# EAGLE board Qwiic-Cellular-Notepad-Panel (EAGLE 9.6.2), part 1 of 2
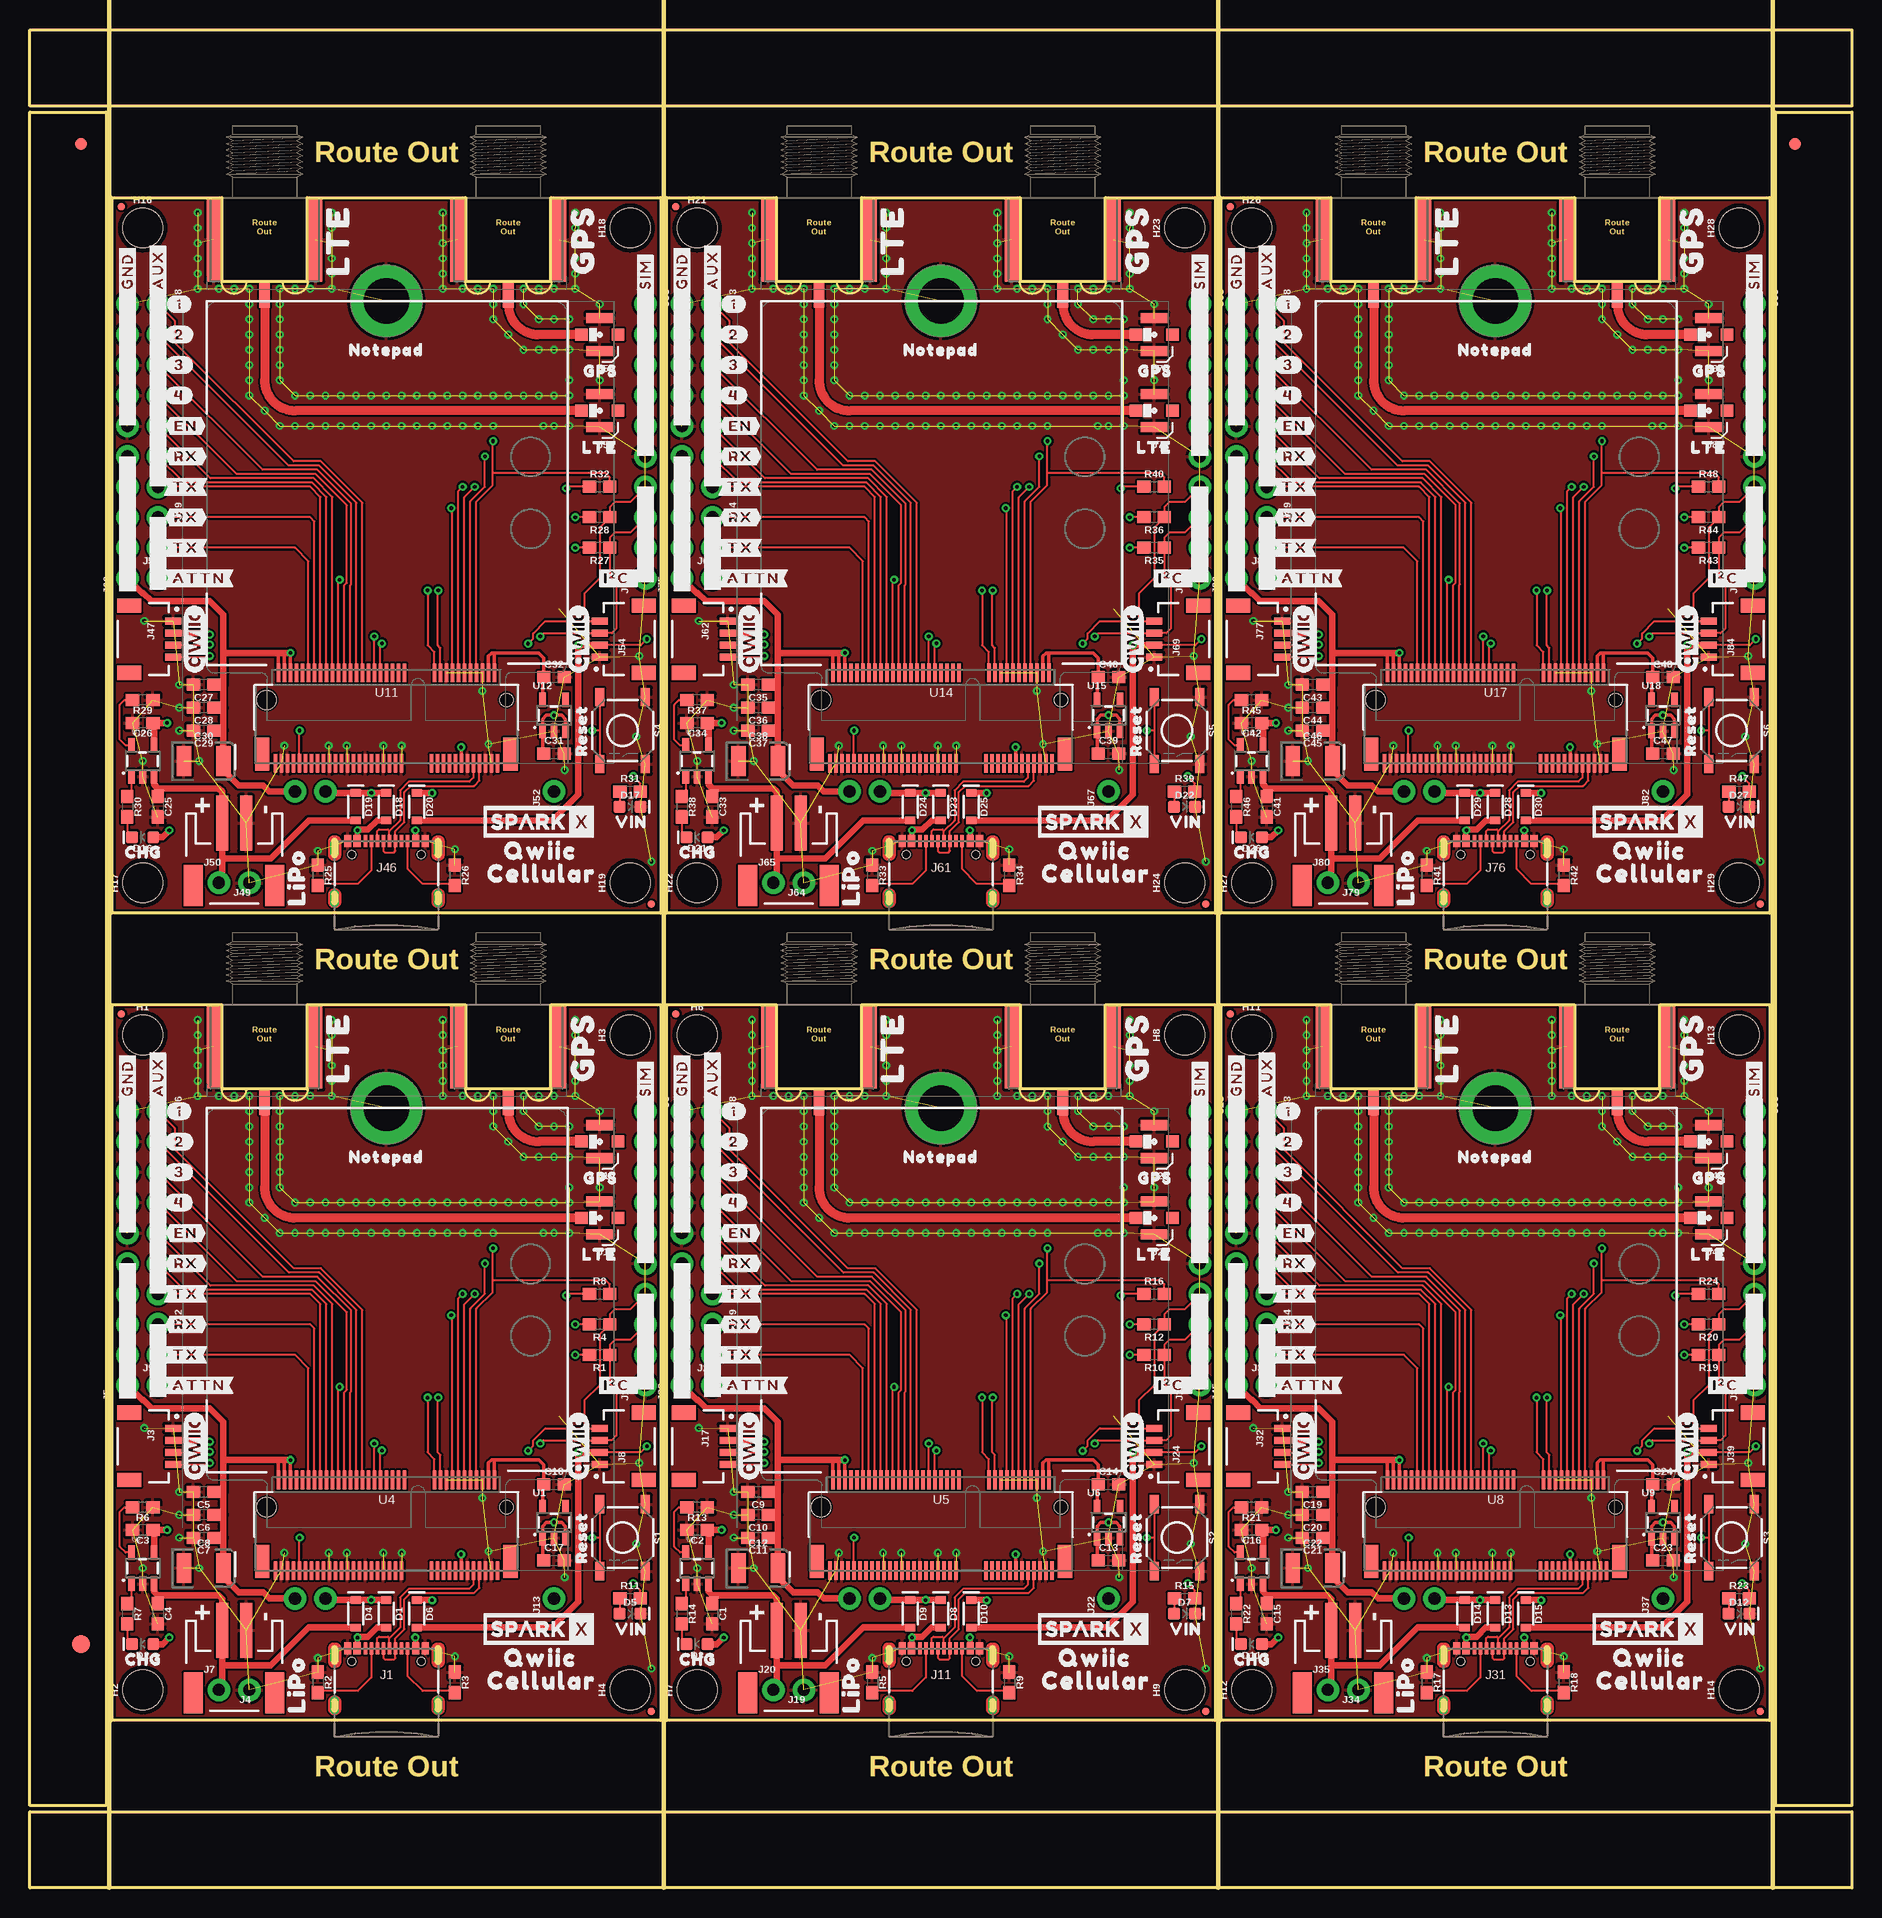
[diagram p0: board, top side]
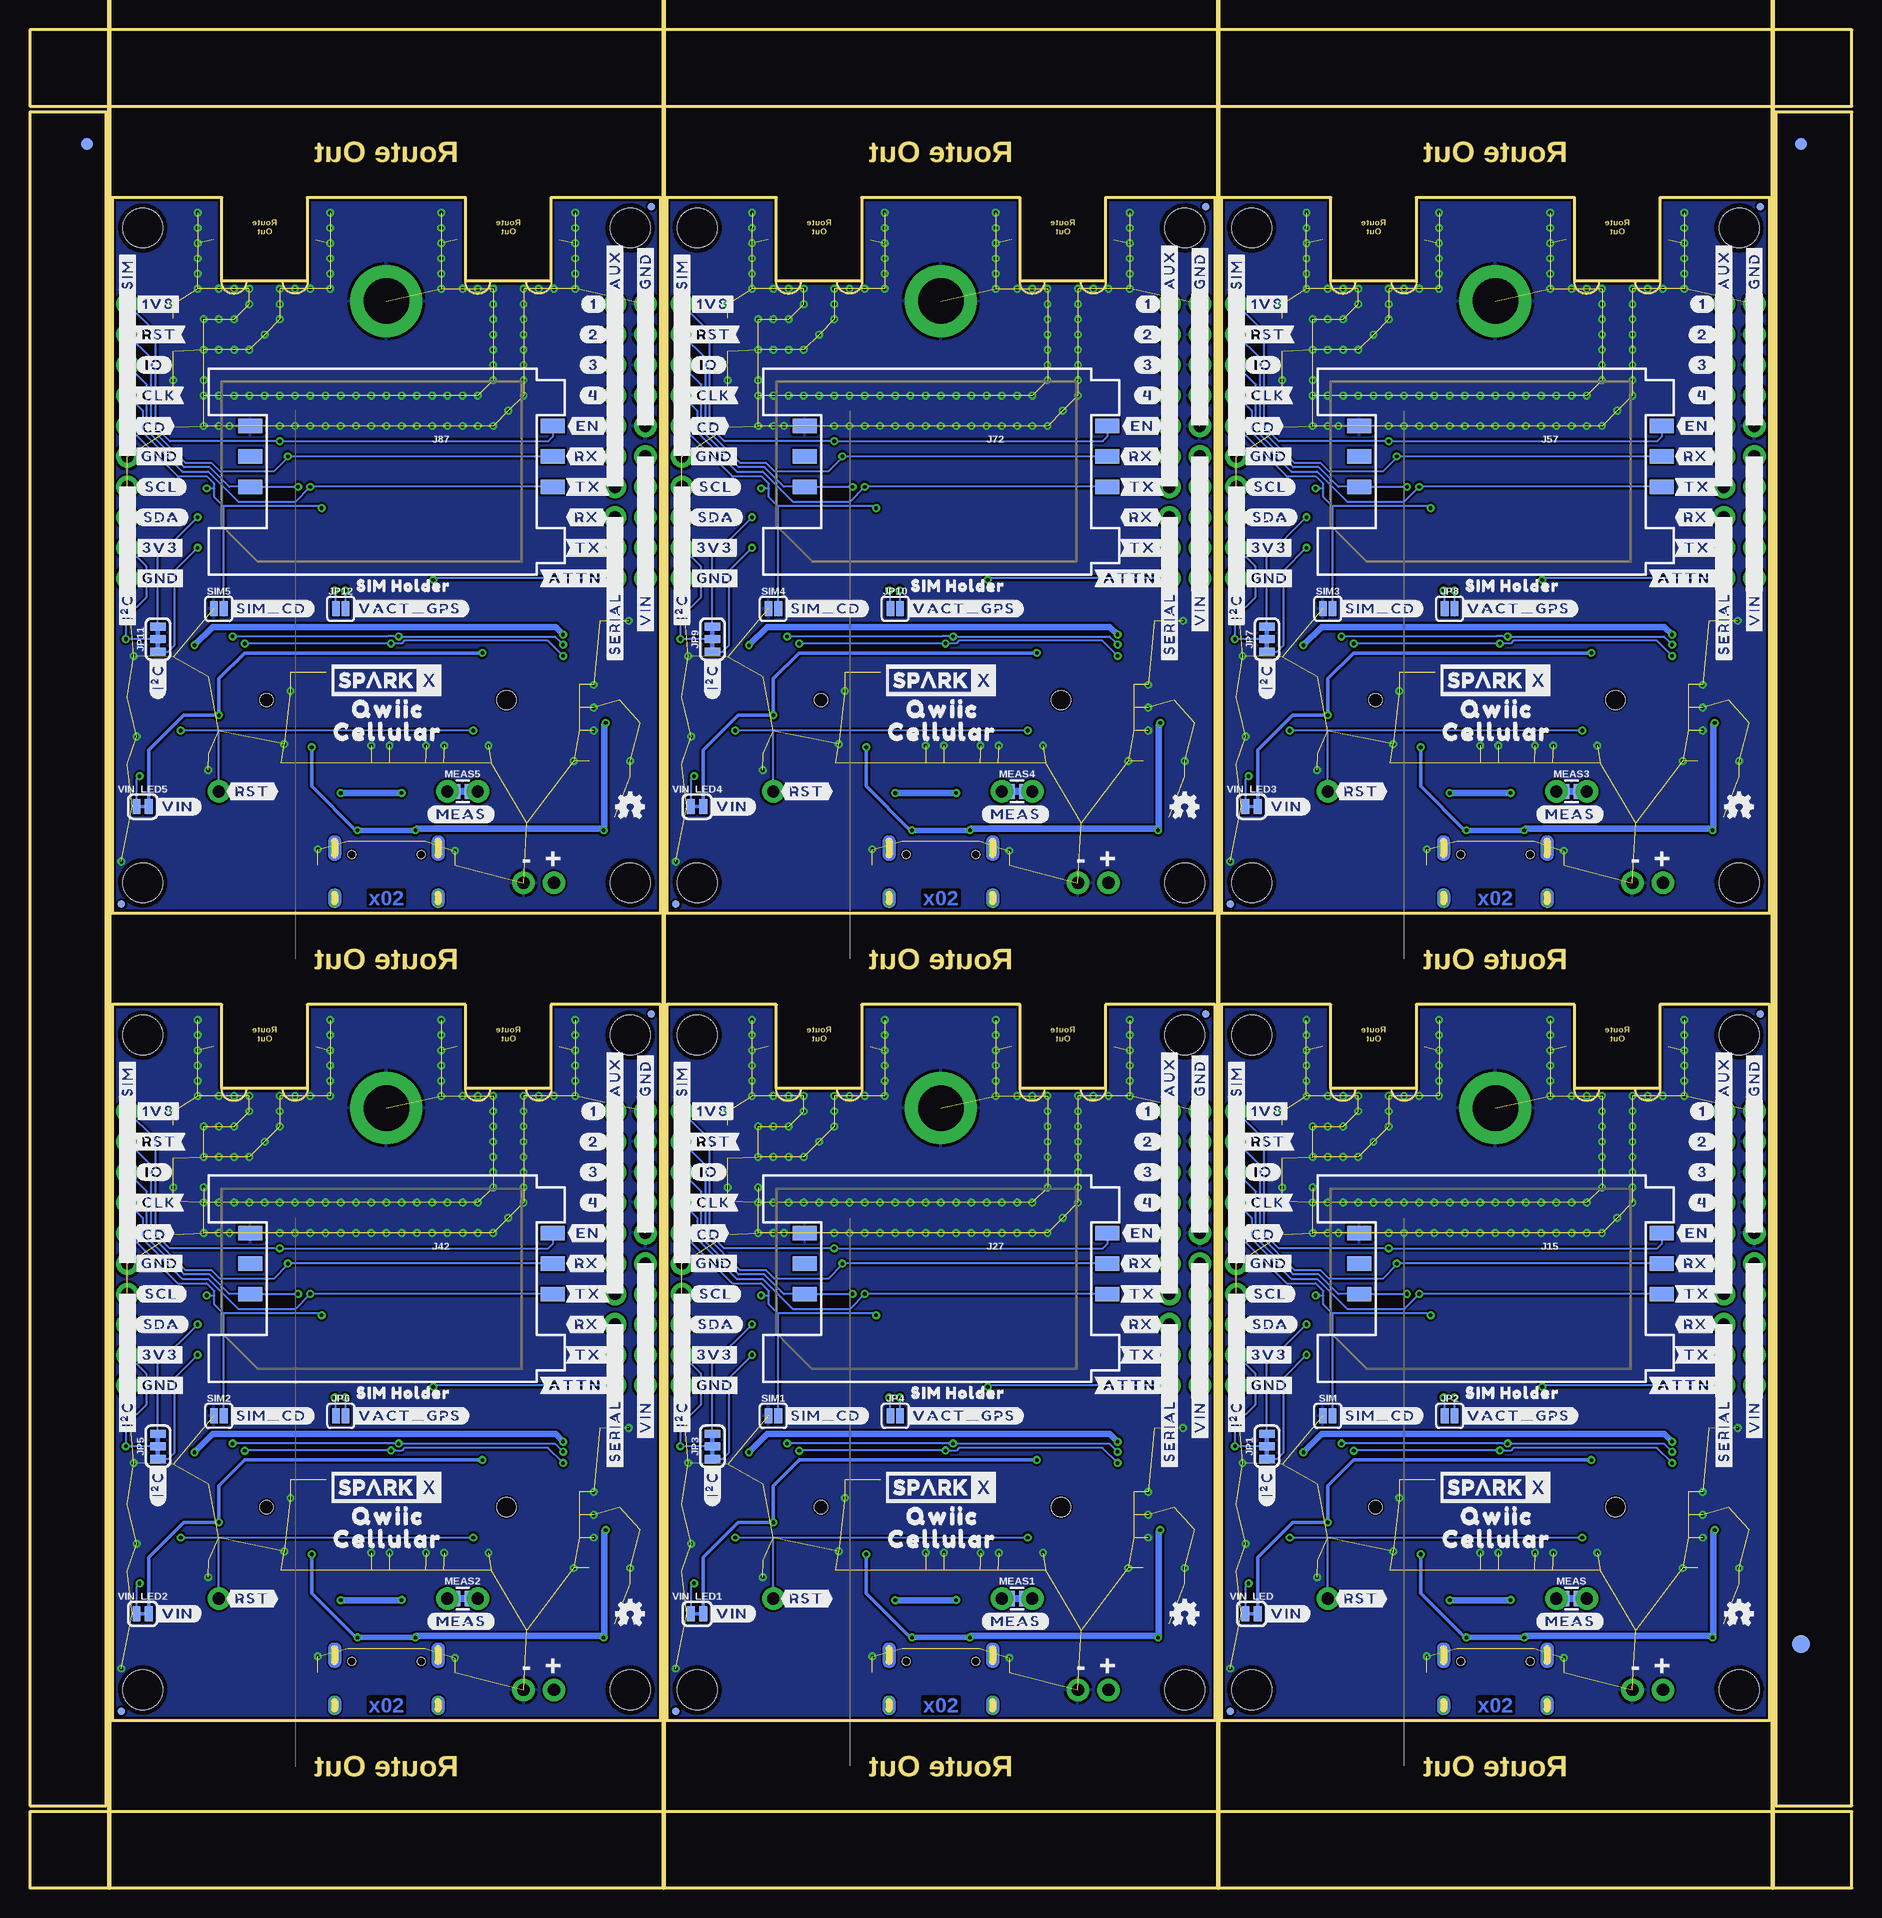
[diagram p1: board, bottom side, seen from below]

Size 151.89 x 154.94 mm. Coordinates in mm from the lower left corner, seen from the top.
Outline: 52.58,13.97 6.86,13.97 6.86,73.66 16,73.66 16,66.67 23.11,66.67 23.11,73.66 36.32,73.66 36.32,66.67 43.43,66.67 43.43,73.66 52.58,73.66 52.58,13.97
Outline: 98.81,13.97 53.09,13.97 53.09,73.66 62.23,73.66 62.23,66.67 69.34,66.67 69.34,73.66 82.55,73.66 82.55,66.67 89.66,66.67 89.66,73.66 98.81,73.66 98.81,13.97
Outline: 145.03,13.97 99.31,13.97 99.31,73.66 108.46,73.66 108.46,66.67 115.57,66.67 115.57,73.66 128.78,73.66 128.78,66.67 135.89,66.67 135.89,73.66 145.03,73.66 145.03,13.97
Outline: 52.58,81.28 6.86,81.28 6.86,140.97 16,140.97 16,133.99 23.11,133.99 23.11,140.97 36.32,140.97 36.32,133.99 43.43,133.99 43.43,140.97 52.58,140.97 52.58,81.28
Outline: 98.81,81.28 53.09,81.28 53.09,140.97 62.23,140.97 62.23,133.99 69.34,133.99 69.34,140.97 82.55,140.97 82.55,133.99 89.66,133.99 89.66,140.97 98.81,140.97 98.81,81.28
Outline: 145.03,81.28 99.31,81.28 99.31,140.97 108.46,140.97 108.46,133.99 115.57,133.99 115.57,140.97 128.78,140.97 128.78,133.99 135.89,133.99 135.89,140.97 145.03,140.97 145.03,81.28
Outline: 0,6.35 151.89,6.35 151.89,0 0,0 0,6.35
Outline: 145.54,148.08 151.89,148.08 151.89,6.86 145.54,6.86 145.54,148.08
Outline: 0,154.94 151.89,154.94 151.89,148.59 0,148.59 0,154.94
Outline: 0,148.08 6.35,148.08 6.35,6.86 0,6.86 0,148.08
Copper layers (1*16): Top 0.035mm / dielectric 1.5mm / Bottom 0.035mm
Design rules "Qwiic-Cellular-Notepad": minimum track width 7mil, minimum drill 12mil, track to track 7mil, track to pad 7mil, pad to pad 7mil, via to via 7mil, smd to smd 7mil, copper to edge 7mil, drill to drill 7mil, minimum pad ring 7mil, minimum via ring 7mil, stop-mask expansion 4mil, vias tented up to drill 25mil, thermal gap 10mil
Net classes: 1 power: width 0.305 mm
Milling: 5 lines

## Footprints (pad centres in the part's own frame; a part is rotated, then mirrored left to right if it is on the bottom)
0603 = smd 1.1 x 1: 1 -0.85,0; 2 0.85,0
EIA3528 = smd 1.2 x 2.5: A 1.65,0; C -1.65,0
SOD-323 = smd 0.63 x 0.83: A 1.15,0; C -1.15,0
LED-0603 = smd 1 x 1: A -0.877,0; C 0.877,0
SMA-EDGE-SMD = smd 1.15 x 7: GND@0 -4.25,-3.5; GND@1 4.25,-3.5 | smd 0.9 x 2.2: SIG 0,-8.1
FIDUCIAL-1X2 = smd 1 x 1: 1 0,0
FIDUCIAL-1.5X3 = smd 1.5 x 1.5: 1 0,0
FIDUCIAL-MICRO = smd 0.635 x 0.635: 1 0,0
STAND-OFF = hole 3.302: 0,0
STAND-OFF-REFLOW-M2.5 = drill 3.8 pad 6: 1 0,0
USB-C-16P-2LAYER-PADS = smd 0.3 x 1: A5 -1.25,-0.34; A6 -0.25,-0.34; A7 0.25,-0.34; A8 1.25,-0.34; B5 1.75,-0.34; B6 0.75,-0.34; B7 -0.75,-0.34; B8 -1.75,-0.34 | smd 0.6 x 1: GND -3.225,-0.34; GND2 3.225,-0.34; VBUS1 -2.45,-0.34; VBUS2 2.45,-0.34 | drill 0.4 pad 0.6 long: SHLD1 -4.318,-0.915; SHLD2 4.318,-0.915; SHLD3 -4.318,-5.095; SHLD4 4.318,-5.095 | hole 0.65: -2.89,-1.445; 2.89,-1.445
1X02_NO_SILK = drill 1.016 pad 1.88: 1 0,0; 2 2.54,0
JST04_1MM_RA = smd 0.6 x 1.35: 1 -1.5,0; 2 -0.5,0; 3 0.5,0; 4 1.5,0 | smd 1.2 x 2: NC1 2.8,-3.675; NC2 -2.8,-3.675
JST-2-SMD = smd 1 x 4.6: 1 -1,-3.7; 2 1,-3.7 | smd 1.6 x 3.4: NC1 -3.4,1.5; NC2 3.4,1.5
1X10_NO_SILK = drill 1.016 pad 1.88: 1 0,0; 2 2.54,0; 3 5.08,0; 4 7.62,0; 5 10.16,0; 6 12.7,0; 7 15.24,0; 8 17.78,0; 9 20.32,0; 10 22.86,0
1X06_NO_SILK = drill 1.016 pad 1.88: 1 0,0; 2 2.54,0; 3 5.08,0; 4 7.62,0; 5 10.16,0; 6 12.7,0
1X01_NO_SILK = drill 1.016 pad 1.88: 1 0,0
U.FL = smd 2.2 x 0.85: 1 0,1.375; 2 0,-1.375 | smd 1.05 x 1: FEED 1.525,0; NC -1.525,0
1X04_NO_SILK = drill 1.016 pad 1.88: 1 0,0; 2 2.54,0; 3 5.08,0; 4 7.62,0
SIMHOLDER = smd 2 x 1.2: C1 -12.61,-3.81; C2 -12.61,-1.27; C3 -12.61,1.27; C5 12.61,-3.81; C6 12.61,-1.27; C7 12.61,1.27
1X07_NO_SILK = drill 1.016 pad 1.88: 1 0,0; 2 2.54,0; 3 5.08,0; 4 7.62,0; 5 10.16,0; 6 12.7,0; 7 15.24,0
SMT-JUMPER_3_2-NC_TRACE_SILK = smd 0.66 x 1.27: 1 -1.041,0; 2 0,0; 3 1.041,0
SMT-JUMPER_2_NO_SILK = smd 0.635 x 1.27: 1 -0.406,0; 2 0.406,0
COMBO-JUMPER_2_NC_TRACE = smd 0.635 x 1.27: 1 -0.508,0; 2 0.508,0 | drill 1.016 pad 1.88: 3 -1.27,0; 4 1.27,0
TACTILE_SWITCH_SMD_5.2MM = smd 1.524 x 0.762: 1 -2.794,1.905; 2 2.794,1.905; 3 -2.794,-1.905; 4 2.794,-1.905
SOT23-5 = smd 0.55 x 1.2: 1 -0.95,-1.3; 2 0,-1.3; 3 0.95,-1.3; 4 0.95,1.3; 5 -0.95,1.3
M.2-CONNECTOR-E = smd 0.3 x 1.55: 1 9.25,-5.275; 2 9,2.275; 3 8.75,-5.275; 4 8.5,2.275; 5 8.25,-5.275; 6 8,2.275; 7 7.75,-5.275; 8 7.5,2.275; 9 7.25,-5.275; 10 7,2.275; 11 6.75,-5.275; 12 6.5,2.275; 13 6.25,-5.275; 14 6,2.275; 15 5.75,-5.275; 16 5.5,2.275; 17 5.25,-5.275; 18 5,2.275; 19 4.75,-5.275; 20 4.5,2.275; 21 4.25,-5.275; 22 4,2.275; 23 3.75,-5.275; 32 1.5,2.275; 33 1.25,-5.275; 34 1,2.275; 35 0.75,-5.275; 36 0.5,2.275; 37 0.25,-5.275; 38 0,2.275; 39 -0.25,-5.275; 40 -0.5,2.275; 41 -0.75,-5.275; 42 -1,2.275; 43 -1.25,-5.275; 44 -1.5,2.275; 45 -1.75,-5.275; 46 -2,2.275; 47 -2.25,-5.275; 48 -2.5,2.275; 49 -2.75,-5.275; 50 -3,2.275; 51 -3.25,-5.275; 52 -3.5,2.275; 53 -3.75,-5.275; 54 -4,2.275; 55 -4.25,-5.275; 56 -4.5,2.275; 57 -4.75,-5.275; 58 -5,2.275; 59 -5.25,-5.275; 60 -5.5,2.275; 61 -5.75,-5.275; 62 -6,2.275; 63 -6.25,-5.275; 64 -6.5,2.275; 65 -6.75,-5.275; 66 -7,2.275; 67 -7.25,-5.275; 68 -7.5,2.275; 69 -7.75,-5.275; 70 -8,2.275; 71 -8.25,-5.275; 72 -8.5,2.275; 73 -8.75,-5.275; 74 -9,2.275; 75 -9.25,-5.275 | smd 1.2 x 2.75: A1 10.35,-4.5; A2 -10.35,-4.5 | hole 1.1: 10,0 | hole 1.6: -10,0
SMT-JUMPER_2_NC_TRACE_SILK = smd 0.66 x 1.27: 1 -0.521,0; 2 0.521,0

## Placement (x,y rotation side)
C1  4.7uF  [0603]  56.9,22.86 270 top
C2  4.7uF  [0603]  55.63,29.84 180 top
C3  4.7uF  [0603]  9.4,29.84 180 top
C4  4.7uF  [0603]  10.67,22.86 270 top
C5  1.0uF  [0603]  14.48,33.02 180 top
C6  0.1uF  [0603]  14.48,31.12 180 top
C7  0.22uF  [0603]  14.48,29.21 180 top
C8  68uF  [EIA3528]  14.48,26.67 0 top
C9  1.0uF  [0603]  60.71,33.02 180 top
C10  0.1uF  [0603]  60.71,31.12 180 top
C11  0.22uF  [0603]  60.71,29.21 180 top
C12  68uF  [EIA3528]  60.71,26.67 0 top
C13  1.0uF  [0603]  89.92,27.3 0 top
C14  1.0uF  [0603]  89.92,33.66 0 top
C15  4.7uF  [0603]  103.12,22.86 270 top
C16  4.7uF  [0603]  101.85,29.84 180 top
C17  1.0uF  [0603]  43.69,27.3 0 top
C18  1.0uF  [0603]  43.69,33.66 0 top
C19  1.0uF  [0603]  106.93,33.02 180 top
C20  0.1uF  [0603]  106.93,31.12 180 top
C21  0.22uF  [0603]  106.93,29.21 180 top
C22  68uF  [EIA3528]  106.93,26.67 0 top
C23  1.0uF  [0603]  136.14,27.3 0 top
C24  1.0uF  [0603]  136.14,33.66 0 top
C25  4.7uF  [0603]  10.67,90.17 270 top
C26  4.7uF  [0603]  9.4,97.16 180 top
C27  1.0uF  [0603]  14.48,100.33 180 top
C28  0.1uF  [0603]  14.48,98.42 180 top
C29  0.22uF  [0603]  14.48,96.52 180 top
C30  68uF  [EIA3528]  14.48,93.98 0 top
C31  1.0uF  [0603]  43.69,94.61 0 top
C32  1.0uF  [0603]  43.69,100.97 0 top
C33  4.7uF  [0603]  56.9,90.17 270 top
C34  4.7uF  [0603]  55.63,97.16 180 top
C35  1.0uF  [0603]  60.71,100.33 180 top
C36  0.1uF  [0603]  60.71,98.42 180 top
C37  0.22uF  [0603]  60.71,96.52 180 top
C38  68uF  [EIA3528]  60.71,93.98 0 top
C39  1.0uF  [0603]  89.92,94.61 0 top
C40  1.0uF  [0603]  89.92,100.97 0 top
C41  4.7uF  [0603]  103.12,90.17 270 top
C42  4.7uF  [0603]  101.85,97.16 180 top
C43  1.0uF  [0603]  106.93,100.33 180 top
C44  0.1uF  [0603]  106.93,98.42 180 top
C45  0.22uF  [0603]  106.93,96.52 180 top
C46  68uF  [EIA3528]  106.93,93.98 0 top
C47  1.0uF  [0603]  136.14,94.61 0 top
C48  1.0uF  [0603]  136.14,100.97 0 top
D1  3A/10V/280mV  [SOD-323]  29.72,22.86 270 top
D2  Yellow  [LED-0603]  9.4,20.32 180 top
D3  Yellow  [LED-0603]  55.63,20.32 180 top
D4  3A/10V/280mV  [SOD-323]  27.18,22.86 270 top
D5  RED  [LED-0603]  50.04,22.86 0 top
D6  3A/10V/280mV  [SOD-323]  32.26,22.86 270 top
D7  RED  [LED-0603]  96.27,22.86 0 top
D8  3A/10V/280mV  [SOD-323]  75.95,22.86 270 top
D9  3A/10V/280mV  [SOD-323]  73.41,22.86 270 top
D10  3A/10V/280mV  [SOD-323]  78.49,22.86 270 top
D11  Yellow  [LED-0603]  101.85,20.32 180 top
D12  RED  [LED-0603]  142.49,22.86 0 top
D13  3A/10V/280mV  [SOD-323]  122.17,22.86 270 top
D14  3A/10V/280mV  [SOD-323]  119.63,22.86 270 top
D15  3A/10V/280mV  [SOD-323]  124.71,22.86 270 top
D16  Yellow  [LED-0603]  9.4,87.63 180 top
D17  RED  [LED-0603]  50.04,90.17 0 top
D18  3A/10V/280mV  [SOD-323]  29.72,90.17 270 top
D19  3A/10V/280mV  [SOD-323]  27.18,90.17 270 top
D20  3A/10V/280mV  [SOD-323]  32.26,90.17 270 top
D21  Yellow  [LED-0603]  55.63,87.63 180 top
D22  RED  [LED-0603]  96.27,90.17 0 top
D23  3A/10V/280mV  [SOD-323]  75.95,90.17 270 top
D24  3A/10V/280mV  [SOD-323]  73.41,90.17 270 top
D25  3A/10V/280mV  [SOD-323]  78.49,90.17 270 top
D26  Yellow  [LED-0603]  101.85,87.63 180 top
D27  RED  [LED-0603]  142.49,90.17 0 top
D28  3A/10V/280mV  [SOD-323]  122.17,90.17 270 top
D29  3A/10V/280mV  [SOD-323]  119.63,90.17 270 top
D30  3A/10V/280mV  [SOD-323]  124.71,90.17 270 top
E1  SMA  [SMA-EDGE-SMD]  65.79,73.66 0 top
E2  SMA  [SMA-EDGE-SMD]  86.11,73.66 0 top
E3  SMA  [SMA-EDGE-SMD]  19.56,73.66 0 top
E4  SMA  [SMA-EDGE-SMD]  39.88,73.66 0 top
E5  SMA  [SMA-EDGE-SMD]  112.01,73.66 0 top
E6  SMA  [SMA-EDGE-SMD]  132.33,73.66 0 top
E7  SMA  [SMA-EDGE-SMD]  19.56,140.97 0 top
E8  SMA  [SMA-EDGE-SMD]  39.88,140.97 0 top
E9  SMA  [SMA-EDGE-SMD]  65.79,140.97 0 top
E10  SMA  [SMA-EDGE-SMD]  86.11,140.97 0 top
E11  SMA  [SMA-EDGE-SMD]  112.01,140.97 0 top
E12  SMA  [SMA-EDGE-SMD]  132.33,140.97 0 top
E$1  [FIDUCIAL-1X2]  4.23,145.41 0 top
E$2  [FIDUCIAL-1X2]  4.23,145.41 0 bottom
E$3  [FIDUCIAL-1X2]  147.15,145.41 0 top
E$4  [FIDUCIAL-1X2]  147.15,145.41 0 bottom
E$5  [FIDUCIAL-1.5X3]  4.23,20.32 0 top
E$6  [FIDUCIAL-1.5X3]  4.23,20.32 0 bottom
FD1  FIDUCIALUFIDUCIAL  [FIDUCIAL-MICRO]  51.82,14.73 90 top
FD2  FIDUCIALUFIDUCIAL  [FIDUCIAL-MICRO]  7.62,72.9 90 top
FD3  FIDUCIALUFIDUCIAL  [FIDUCIAL-MICRO]  51.82,14.73 270 bottom
FD4  FIDUCIALUFIDUCIAL  [FIDUCIAL-MICRO]  7.62,72.9 270 bottom
FD5  FIDUCIALUFIDUCIAL  [FIDUCIAL-MICRO]  98.04,14.73 90 top
FD6  FIDUCIALUFIDUCIAL  [FIDUCIAL-MICRO]  53.85,72.9 90 top
FD7  FIDUCIALUFIDUCIAL  [FIDUCIAL-MICRO]  98.04,14.73 270 bottom
FD8  FIDUCIALUFIDUCIAL  [FIDUCIAL-MICRO]  53.85,72.9 270 bottom
FD9  FIDUCIALUFIDUCIAL  [FIDUCIAL-MICRO]  144.27,14.73 90 top
FD10  FIDUCIALUFIDUCIAL  [FIDUCIAL-MICRO]  100.08,72.9 90 top
FD11  FIDUCIALUFIDUCIAL  [FIDUCIAL-MICRO]  144.27,14.73 270 bottom
FD12  FIDUCIALUFIDUCIAL  [FIDUCIAL-MICRO]  100.08,72.9 270 bottom
FD13  FIDUCIALUFIDUCIAL  [FIDUCIAL-MICRO]  51.82,82.04 90 top
FD14  FIDUCIALUFIDUCIAL  [FIDUCIAL-MICRO]  7.62,140.21 90 top
FD15  FIDUCIALUFIDUCIAL  [FIDUCIAL-MICRO]  51.82,82.04 270 bottom
FD16  FIDUCIALUFIDUCIAL  [FIDUCIAL-MICRO]  7.62,140.21 270 bottom
FD17  FIDUCIALUFIDUCIAL  [FIDUCIAL-MICRO]  98.04,82.04 90 top
FD18  FIDUCIALUFIDUCIAL  [FIDUCIAL-MICRO]  53.85,140.21 90 top
FD19  FIDUCIALUFIDUCIAL  [FIDUCIAL-MICRO]  98.04,82.04 270 bottom
FD20  FIDUCIALUFIDUCIAL  [FIDUCIAL-MICRO]  53.85,140.21 270 bottom
FD21  FIDUCIALUFIDUCIAL  [FIDUCIAL-MICRO]  144.27,82.04 90 top
FD22  FIDUCIALUFIDUCIAL  [FIDUCIAL-MICRO]  100.08,140.21 90 top
FD23  FIDUCIALUFIDUCIAL  [FIDUCIAL-MICRO]  144.27,82.04 270 bottom
FD24  FIDUCIALUFIDUCIAL  [FIDUCIAL-MICRO]  100.08,140.21 270 bottom
H1  STAND-OFF  [STAND-OFF]  9.4,71.12 0 top
H2  STAND-OFF  [STAND-OFF]  9.4,16.51 90 top
H3  STAND-OFF  [STAND-OFF]  50.04,71.12 90 top
H4  STAND-OFF  [STAND-OFF]  50.04,16.51 90 top
H5  STAND-OFF  [STAND-OFF-REFLOW-M2.5]  29.72,65.02 0 top
H6  STAND-OFF  [STAND-OFF]  55.63,71.12 0 top
H7  STAND-OFF  [STAND-OFF]  55.63,16.51 90 top
H8  STAND-OFF  [STAND-OFF]  96.27,71.12 90 top
H9  STAND-OFF  [STAND-OFF]  96.27,16.51 90 top
H10  STAND-OFF  [STAND-OFF-REFLOW-M2.5]  75.95,65.02 0 top
H11  STAND-OFF  [STAND-OFF]  101.85,71.12 0 top
H12  STAND-OFF  [STAND-OFF]  101.85,16.51 90 top
H13  STAND-OFF  [STAND-OFF]  142.49,71.12 90 top
H14  STAND-OFF  [STAND-OFF]  142.49,16.51 90 top
H15  STAND-OFF  [STAND-OFF-REFLOW-M2.5]  122.17,65.02 0 top
H16  STAND-OFF  [STAND-OFF]  9.4,138.43 0 top
H17  STAND-OFF  [STAND-OFF]  9.4,83.82 90 top
H18  STAND-OFF  [STAND-OFF]  50.04,138.43 90 top
H19  STAND-OFF  [STAND-OFF]  50.04,83.82 90 top
H20  STAND-OFF  [STAND-OFF-REFLOW-M2.5]  29.72,132.33 0 top
H21  STAND-OFF  [STAND-OFF]  55.63,138.43 0 top
H22  STAND-OFF  [STAND-OFF]  55.63,83.82 90 top
H23  STAND-OFF  [STAND-OFF]  96.27,138.43 90 top
H24  STAND-OFF  [STAND-OFF]  96.27,83.82 90 top
H25  STAND-OFF  [STAND-OFF-REFLOW-M2.5]  75.95,132.33 0 top
H26  STAND-OFF  [STAND-OFF]  101.85,138.43 0 top
H27  STAND-OFF  [STAND-OFF]  101.85,83.82 90 top
H28  STAND-OFF  [STAND-OFF]  142.49,138.43 90 top
H29  STAND-OFF  [STAND-OFF]  142.49,83.82 90 top
H30  STAND-OFF  [STAND-OFF-REFLOW-M2.5]  122.17,132.33 0 top
J1  [USB-C-16P-2LAYER-PADS]  29.72,20.32 0 top
J2  [1X02_NO_SILK]  10.67,46.99 270 top
J3  QWIIC_RIGHT_ANGLE  [JST04_1MM_RA]  11.94,36.83 270 top
J4  [JST-2-SMD]  17.02,17.78 180 top
J5  [1X10_NO_SILK]  8.13,41.91 90 top
J6  External SIM  [1X06_NO_SILK]  51.31,64.77 270 top
J7  [1X02_NO_SILK]  15.75,16.51 0 top
J8  QWIIC_RIGHT_ANGLE  [JST04_1MM_RA]  47.5,36.83 90 top
J9  [1X01_NO_SILK]  10.67,41.91 0 top
J10  U.FL  [U.FL]  47.5,62.23 180 top
J11  [USB-C-16P-2LAYER-PADS]  75.95,20.32 0 top
J12  U.FL  [U.FL]  47.5,55.88 180 top
J13  [1X01_NO_SILK]  43.69,24.13 90 top
J14  I2C  [1X04_NO_SILK]  51.31,41.91 90 top
J15  SIM Socket  [SIMHOLDER]  28.45,50.8 180 bottom
J16  [1X07_NO_SILK]  10.67,64.77 270 top
J17  QWIIC_RIGHT_ANGLE  [JST04_1MM_RA]  58.17,36.83 270 top
J18  I2C  [1X04_NO_SILK]  97.54,41.91 90 top
J19  [JST-2-SMD]  63.25,17.78 180 top
J20  [1X02_NO_SILK]  61.98,16.51 0 top
J21  [1X01_NO_SILK]  56.9,41.91 0 top
J22  [1X01_NO_SILK]  89.92,24.13 90 top
J23  External SIM  [1X06_NO_SILK]  97.54,64.77 270 top
J24  QWIIC_RIGHT_ANGLE  [JST04_1MM_RA]  93.73,36.83 90 top
J25  U.FL  [U.FL]  93.73,62.23 180 top
J26  U.FL  [U.FL]  93.73,55.88 180 top
J27  SIM Socket  [SIMHOLDER]  74.68,50.8 180 bottom
J28  [1X07_NO_SILK]  56.9,64.77 270 top
J29  [1X02_NO_SILK]  56.9,46.99 270 top
J30  [1X10_NO_SILK]  54.36,41.91 90 top
J31  [USB-C-16P-2LAYER-PADS]  122.17,20.32 0 top
J32  QWIIC_RIGHT_ANGLE  [JST04_1MM_RA]  104.39,36.83 270 top
J33  I2C  [1X04_NO_SILK]  143.76,41.91 90 top
J34  [JST-2-SMD]  109.47,17.78 180 top
J35  [1X02_NO_SILK]  108.2,16.51 0 top
J36  [1X01_NO_SILK]  103.12,41.91 0 top
J37  [1X01_NO_SILK]  136.14,24.13 90 top
J38  External SIM  [1X06_NO_SILK]  143.76,64.77 270 top
J39  QWIIC_RIGHT_ANGLE  [JST04_1MM_RA]  139.95,36.83 90 top
J40  U.FL  [U.FL]  139.95,62.23 180 top
J41  U.FL  [U.FL]  139.95,55.88 180 top
J42  SIM Socket  [SIMHOLDER]  120.9,50.8 180 bottom
J43  [1X07_NO_SILK]  103.12,64.77 270 top
J44  [1X02_NO_SILK]  103.12,46.99 270 top
J45  [1X10_NO_SILK]  100.58,41.91 90 top
J46  [USB-C-16P-2LAYER-PADS]  29.72,87.63 0 top
J47  QWIIC_RIGHT_ANGLE  [JST04_1MM_RA]  11.94,104.14 270 top
J48  I2C  [1X04_NO_SILK]  51.31,109.22 90 top
J49  [JST-2-SMD]  17.02,85.09 180 top
J50  [1X02_NO_SILK]  15.75,83.82 0 top
J51  [1X01_NO_SILK]  10.67,109.22 0 top
J52  [1X01_NO_SILK]  43.69,91.44 90 top
J53  External SIM  [1X06_NO_SILK]  51.31,132.08 270 top
J54  QWIIC_RIGHT_ANGLE  [JST04_1MM_RA]  47.5,104.14 90 top
J55  U.FL  [U.FL]  47.5,129.54 180 top
J56  U.FL  [U.FL]  47.5,123.19 180 top
J57  SIM Socket  [SIMHOLDER]  28.45,118.11 180 bottom
J58  [1X07_NO_SILK]  10.67,132.08 270 top
J59  [1X02_NO_SILK]  10.67,114.3 270 top
J60  [1X10_NO_SILK]  8.13,109.22 90 top
J61  [USB-C-16P-2LAYER-PADS]  75.95,87.63 0 top
J62  QWIIC_RIGHT_ANGLE  [JST04_1MM_RA]  58.17,104.14 270 top
J63  I2C  [1X04_NO_SILK]  97.54,109.22 90 top
J64  [JST-2-SMD]  63.25,85.09 180 top
J65  [1X02_NO_SILK]  61.98,83.82 0 top
J66  [1X01_NO_SILK]  56.9,109.22 0 top
J67  [1X01_NO_SILK]  89.92,91.44 90 top
J68  External SIM  [1X06_NO_SILK]  97.54,132.08 270 top
J69  QWIIC_RIGHT_ANGLE  [JST04_1MM_RA]  93.73,104.14 90 top
J70  U.FL  [U.FL]  93.73,129.54 180 top
J71  U.FL  [U.FL]  93.73,123.19 180 top
J72  SIM Socket  [SIMHOLDER]  74.68,118.11 180 bottom
J73  [1X07_NO_SILK]  56.9,132.08 270 top
J74  [1X02_NO_SILK]  56.9,114.3 270 top
J75  [1X10_NO_SILK]  54.36,109.22 90 top
J76  [USB-C-16P-2LAYER-PADS]  122.17,87.63 0 top
J77  QWIIC_RIGHT_ANGLE  [JST04_1MM_RA]  104.39,104.14 270 top
J78  I2C  [1X04_NO_SILK]  143.76,109.22 90 top
J79  [JST-2-SMD]  109.47,85.09 180 top
J80  [1X02_NO_SILK]  108.2,83.82 0 top
J81  [1X01_NO_SILK]  103.12,109.22 0 top
J82  [1X01_NO_SILK]  136.14,91.44 90 top
J83  External SIM  [1X06_NO_SILK]  143.76,132.08 270 top
J84  QWIIC_RIGHT_ANGLE  [JST04_1MM_RA]  139.95,104.14 90 top
J85  U.FL  [U.FL]  139.95,129.54 180 top
J86  U.FL  [U.FL]  139.95,123.19 180 top
J87  SIM Socket  [SIMHOLDER]  120.9,118.11 180 bottom
J88  [1X07_NO_SILK]  103.12,132.08 270 top
J89  [1X02_NO_SILK]  103.12,114.3 270 top
J90  [1X10_NO_SILK]  100.58,109.22 90 top
JP1  [SMT-JUMPER_3_2-NC_TRACE_SILK]  48.77,36.83 90 bottom
JP2  GPS_ANT_PWR  [SMT-JUMPER_2_NO_SILK]  33.53,39.37 0 bottom
JP3  [SMT-JUMPER_3_2-NC_TRACE_SILK]  95,36.83 90 bottom
JP4  GPS_ANT_PWR  [SMT-JUMPER_2_NO_SILK]  79.76,39.37 0 bottom
JP5  [SMT-JUMPER_3_2-NC_TRACE_SILK]  141.22,36.83 90 bottom
JP6  GPS_ANT_PWR  [SMT-JUMPER_2_NO_SILK]  125.98,39.37 0 bottom
JP7  [SMT-JUMPER_3_2-NC_TRACE_SILK]  48.77,104.14 90 bottom
JP8  GPS_ANT_PWR  [SMT-JUMPER_2_NO_SILK]  33.53,106.68 0 bottom
JP9  [SMT-JUMPER_3_2-NC_TRACE_SILK]  95,104.14 90 bottom
JP10  GPS_ANT_PWR  [SMT-JUMPER_2_NO_SILK]  79.76,106.68 0 bottom
JP11  [SMT-JUMPER_3_2-NC_TRACE_SILK]  141.22,104.14 90 bottom
JP12  GPS_ANT_PWR  [SMT-JUMPER_2_NO_SILK]  125.98,106.68 0 bottom
LOGO1  QWIIC_LOGO_CONNECTOR  [QWIIC_5.5MM]  91.95,36.83 90 top
LOGO2  QWIIC_LOGO_CONNECTOR  [QWIIC_5.5MM]  45.72,36.83 90 top
LOGO3  OSHW-LOGOMINI  [OSHW-LOGO-MINI]  9.4,22.86 0 bottom
LOGO4  OSHW-LOGOMINI  [OSHW-LOGO-MINI]  55.63,22.86 0 bottom
LOGO5  QWIIC_LOGO_CONNECTOR  [QWIIC_5.5MM]  13.72,36.83 90 top
LOGO6  QWIIC_LOGO_CONNECTOR  [QWIIC_5.5MM]  59.94,36.83 90 top
LOGO7  QWIIC_LOGO_CONNECTOR  [QWIIC_5.5MM]  138.18,36.83 90 top
LOGO8  OSHW-LOGOMINI  [OSHW-LOGO-MINI]  101.85,22.86 0 bottom
LOGO9  QWIIC_LOGO_CONNECTOR  [QWIIC_5.5MM]  106.17,36.83 90 top
LOGO10  QWIIC_LOGO_CONNECTOR  [QWIIC_5.5MM]  45.72,104.14 90 top
LOGO11  OSHW-LOGOMINI  [OSHW-LOGO-MINI]  9.4,90.17 0 bottom
LOGO12  QWIIC_LOGO_CONNECTOR  [QWIIC_5.5MM]  13.72,104.14 90 top
LOGO13  QWIIC_LOGO_CONNECTOR  [QWIIC_5.5MM]  91.95,104.14 90 top
LOGO14  OSHW-LOGOMINI  [OSHW-LOGO-MINI]  55.63,90.17 0 bottom
LOGO15  QWIIC_LOGO_CONNECTOR  [QWIIC_5.5MM]  59.94,104.14 90 top
LOGO16  QWIIC_LOGO_CONNECTOR  [QWIIC_5.5MM]  138.18,104.14 90 top
LOGO17  OSHW-LOGOMINI  [OSHW-LOGO-MINI]  101.85,90.17 0 bottom
LOGO18  QWIIC_LOGO_CONNECTOR  [QWIIC_5.5MM]  106.17,104.14 90 top
MEAS  [COMBO-JUMPER_2_NC_TRACE]  23.37,24.13 0 bottom
MEAS1  [COMBO-JUMPER_2_NC_TRACE]  69.6,24.13 0 bottom
MEAS2  [COMBO-JUMPER_2_NC_TRACE]  115.82,24.13 0 bottom
MEAS3  [COMBO-JUMPER_2_NC_TRACE]  23.37,91.44 0 bottom
MEAS4  [COMBO-JUMPER_2_NC_TRACE]  69.6,91.44 0 bottom
MEAS5  [COMBO-JUMPER_2_NC_TRACE]  115.82,91.44 0 bottom
R1  2.2k  [0603]  47.5,44.45 180 top
R2  5.1k  [0603]  24,17.14 270 top
R3  5.1k  [0603]  35.43,17.14 270 top
R4  2.2k  [0603]  47.5,46.99 180 top
R5  5.1k  [0603]  70.23,17.14 270 top
R6  2.2k  [0603]  9.4,31.75 180 top
R7  1k  [0603]  8.13,22.86 270 top
R8  10k  [0603]  47.5,49.53 0 top
R9  5.1k  [0603]  81.66,17.14 270 top
R10  2.2k  [0603]  93.73,44.45 180 top
R11  1k  [0603]  50.04,24.13 0 top
R12  2.2k  [0603]  93.73,46.99 180 top
R13  2.2k  [0603]  55.63,31.75 180 top
R14  1k  [0603]  54.36,22.86 270 top
R15  1k  [0603]  96.27,24.13 0 top
R16  10k  [0603]  93.73,49.53 0 top
R17  5.1k  [0603]  116.46,17.14 270 top
R18  5.1k  [0603]  127.89,17.14 270 top
R19  2.2k  [0603]  139.95,44.45 180 top
R20  2.2k  [0603]  139.95,46.99 180 top
R21  2.2k  [0603]  101.85,31.75 180 top
R22  1k  [0603]  100.58,22.86 270 top
R23  1k  [0603]  142.49,24.13 0 top
R24  10k  [0603]  139.95,49.53 0 top
R25  5.1k  [0603]  24,84.45 270 top
R26  5.1k  [0603]  35.43,84.45 270 top
R27  2.2k  [0603]  47.5,111.76 180 top
R28  2.2k  [0603]  47.5,114.3 180 top
R29  2.2k  [0603]  9.4,99.06 180 top
R30  1k  [0603]  8.13,90.17 270 top
R31  1k  [0603]  50.04,91.44 0 top
R32  10k  [0603]  47.5,116.84 0 top
R33  5.1k  [0603]  70.23,84.45 270 top
R34  5.1k  [0603]  81.66,84.45 270 top
R35  2.2k  [0603]  93.73,111.76 180 top
R36  2.2k  [0603]  93.73,114.3 180 top
R37  2.2k  [0603]  55.63,99.06 180 top
R38  1k  [0603]  54.36,90.17 270 top
R39  1k  [0603]  96.27,91.44 0 top
R40  10k  [0603]  93.73,116.84 0 top
R41  5.1k  [0603]  116.46,84.45 270 top
R42  5.1k  [0603]  127.89,84.45 270 top
R43  2.2k  [0603]  139.95,111.76 180 top
R44  2.2k  [0603]  139.95,114.3 180 top
R45  2.2k  [0603]  101.85,99.06 180 top
R46  1k  [0603]  100.58,90.17 270 top
R47  1k  [0603]  142.49,91.44 0 top
R48  10k  [0603]  139.95,116.84 0 top
S1  Reset  [TACTILE_SWITCH_SMD_5.2MM]  49.4,29.21 270 top
S2  Reset  [TACTILE_SWITCH_SMD_5.2MM]  95.63,29.21 270 top
S3  Reset  [TACTILE_SWITCH_SMD_5.2MM]  141.86,29.21 270 top
S4  Reset  [TACTILE_SWITCH_SMD_5.2MM]  49.4,96.52 270 top
S5  Reset  [TACTILE_SWITCH_SMD_5.2MM]  95.63,96.52 270 top
S6  Reset  [TACTILE_SWITCH_SMD_5.2MM]  141.86,96.52 270 top
SIM  [SMT-JUMPER_2_NO_SILK]  43.69,39.37 0 bottom
SIM1  [SMT-JUMPER_2_NO_SILK]  89.92,39.37 0 bottom
SIM2  [SMT-JUMPER_2_NO_SILK]  136.14,39.37 0 bottom
SIM3  [SMT-JUMPER_2_NO_SILK]  43.69,106.68 0 bottom
SIM4  [SMT-JUMPER_2_NO_SILK]  89.92,106.68 0 bottom
SIM5  [SMT-JUMPER_2_NO_SILK]  136.14,106.68 0 bottom
U1  STLQ015-3.3V  [SOT23-5]  43.69,30.48 0 top
U2  MCP73831  [SOT23-5]  9.4,26.67 0 top
U3  MCP73831  [SOT23-5]  55.63,26.67 0 top
U4  BLUES NOTECARD  [M.2-CONNECTOR-E]  29.72,31.75 0 top
U5  BLUES NOTECARD  [M.2-CONNECTOR-E]  75.95,31.75 0 top
U6  STLQ015-3.3V  [SOT23-5]  89.92,30.48 0 top
U7  MCP73831  [SOT23-5]  101.85,26.67 0 top
U8  BLUES NOTECARD  [M.2-CONNECTOR-E]  122.17,31.75 0 top
U9  STLQ015-3.3V  [SOT23-5]  136.14,30.48 0 top
U10  MCP73831  [SOT23-5]  9.4,93.98 0 top
U11  BLUES NOTECARD  [M.2-CONNECTOR-E]  29.72,99.06 0 top
U12  STLQ015-3.3V  [SOT23-5]  43.69,97.79 0 top
U13  MCP73831  [SOT23-5]  55.63,93.98 0 top
U14  BLUES NOTECARD  [M.2-CONNECTOR-E]  75.95,99.06 0 top
U15  STLQ015-3.3V  [SOT23-5]  89.92,97.79 0 top
U16  MCP73831  [SOT23-5]  101.85,93.98 0 top
U17  BLUES NOTECARD  [M.2-CONNECTOR-E]  122.17,99.06 0 top
U18  STLQ015-3.3V  [SOT23-5]  136.14,97.79 0 top
U$1  [#1#1]  13.46,64.77 0 bottom
U$2  [#3V3#2]  50.8,44.45 0 bottom
U$3  [#GND#0]  50.86,52.07 0 bottom
U$4  [#2#2]  13.59,62.23 0 bottom
U$5  [#3#3]  13.59,59.69 0 bottom
U$6  [#4#4]  13.59,57.15 0 bottom
U$7  [GPS_0]  46.1,65.91 90 top
U$8  [#SERIAL#1]  10.67,34.8 90 bottom
U$9  [#I�C_#0]  51.31,37.72 90 bottom
U$10  [#I�C#0]  48.77,31.88 90 bottom
U$11  [#AUX#0]  10.67,65.28 90 bottom
U$12  [LTE_1]  25.65,65.79 90 top
U$13  [#GND#3]  50.8,41.91 0 bottom
U$14  [#RX#6]  14.73,52.07 0 bottom
U$15  [LIPO0]  22.23,13.59 90 top
U$16  [#TX#5]  14.73,49.53 0 bottom
U$17  [#SCL#1]  50.55,49.53 0 bottom
U$18  [#GND#0]  8.13,65.28 90 bottom
U$19  [#EN#0]  14.61,54.61 0 bottom
U$20  [NOTEPAD0]  25.91,60.96 0 top
U$21  [#SDA#0]  50.67,46.99 0 bottom
U$22  [#GND#0]  8.13,65.28 90 top
U$23  [#VIN#0]  8.13,37.21 90 bottom
U$24  [#VACT_GPS#0]  32.77,39.37 0 bottom
U$25  [#SIM_CD#0]  42.93,39.37 0 bottom
U$26  [QWIIC0]  33.66,30.99 0 bottom
U$27  [SIM_HOLDER0]  32.89,41.27 0 bottom
U$28  [#MEAS#3]  26.29,22.23 0 bottom
U$29  [CELLULAR1]  37.08,17.27 0 top
U$30  [#RST#0]  43.05,24.13 0 bottom
U$31  [QWIIC0]  38.48,19.18 0 top
U$32  [CELLULAR1]  35.18,29.08 0 bottom
U$33  [#VIN#1]  49.15,22.86 0 bottom
U$34  [##CD##1]  50.8,54.61 0 bottom
U$35  [#1V8#4]  50.8,64.77 0 bottom
U$36  [#CLK#3]  50.8,57.15 0 bottom
U$37  [#IO#2]  50.55,59.69 0 bottom
U$38  [#RST#5]  50.8,62.23 0 bottom
U$39  [#SIM#0]  51.31,65.28 90 bottom
U$40  [#AUX#0]  10.67,65.28 90 top
U$41  [#1#1]  11.43,64.77 0 top
U$42  [#2#2]  11.3,62.23 0 top
U$43  [#3#3]  11.3,59.69 0 top
U$44  [#4#4]  11.3,57.15 0 top
U$45  [#EN#0]  11.3,54.61 0 top
U$46  [#RX#6]  11.3,52.07 0 top
U$47  [#TX#5]  11.18,49.53 0 top
U$48  [#RX#0]  11.3,46.99 0 top
U$49  [#TX#1]  11.18,44.45 0 top
U$50  [#ATTN#2]  11.18,41.91 0 top
U$51  [#SIM#0]  51.31,65.28 90 top
U$52  [#RX#0]  14.73,46.99 0 bottom
U$53  [#I�C_#0]  47.12,41.91 0 top
U$54  [#TX#1]  14.73,44.45 0 bottom
U$55  [#ATTN#2]  16.89,41.91 0 bottom
U$56  SPARKX-LOGO4  [SPARKX-MEDIUM]  42.42,21.59 0 top
U$57  SPARKX-LOGO4  [SPARKX-MEDIUM]  29.72,33.4 0 bottom
U$58  [GPS0]  45.47,59.18 0 top
U$59  [LTE1]  45.34,52.83 0 top
U$60  [RESET1]  92.2,26.42 90 top
U$61  [VIN1]  94.36,21.59 0 top
U$62  [CHG1]  53.47,19.05 0 top
U$63  [#GND#0]  54.36,65.28 90 bottom
U$64  [LIPO0]  68.45,13.59 90 top
U$65  [#MEAS#3]  72.52,22.23 0 bottom
U$66  [#RST#0]  89.28,24.13 0 bottom
U$67  [#VIN#1]  95.38,22.86 0 bottom
U$68  [#RX#0]  60.96,46.99 0 bottom
U$69  [#TX#1]  60.96,44.45 0 bottom
U$70  [#ATTN#2]  63.12,41.91 0 bottom
U$71  [GPS0]  91.69,59.18 0 top
U$72  [LTE1]  91.57,52.83 0 top
U$73  [#GND#0]  97.09,52.07 0 bottom
U$74  [#3V3#2]  97.03,44.45 0 bottom
U$75  [#GND#3]  97.03,41.91 0 bottom
U$76  [#SCL#1]  96.77,49.53 0 bottom
U$77  [#SDA#0]  96.9,46.99 0 bottom
U$78  [#VACT_GPS#0]  78.99,39.37 0 bottom
U$79  [#SIM_CD#0]  89.15,39.37 0 bottom
U$80  [SIM_HOLDER0]  79.12,41.27 0 bottom
U$81  [CELLULAR1]  83.31,17.27 0 top
U$82  [QWIIC0]  84.71,19.18 0 top
U$83  [#1#1]  59.69,64.77 0 bottom
U$84  [#2#2]  59.82,62.23 0 bottom
U$85  [#3#3]  59.82,59.69 0 bottom
U$86  [#4#4]  59.82,57.15 0 bottom
U$87  [#AUX#0]  56.9,65.28 90 bottom
U$88  [#RX#6]  60.96,52.07 0 bottom
U$89  [#TX#5]  60.96,49.53 0 bottom
U$90  [#EN#0]  60.83,54.61 0 bottom
U$91  [#VIN#0]  54.36,37.21 90 bottom
U$92  [RESET1]  45.97,26.42 90 top
U$93  [QWIIC0]  79.88,30.99 0 bottom
U$94  [VIN1]  48.13,21.59 0 top
U$95  [CELLULAR1]  81.41,29.08 0 bottom
U$96  [CHG1]  7.24,19.05 0 top
U$97  [NOTEPAD0]  72.14,60.96 0 top
U$98  [#1V8#4]  97.03,64.77 0 bottom
U$99  [##CD##1]  97.03,54.61 0 bottom
U$100  [#CLK#3]  97.03,57.15 0 bottom
U$101  [#IO#2]  96.77,59.69 0 bottom
U$102  [#RST#5]  97.03,62.23 0 bottom
U$103  [#SIM#0]  97.54,65.28 90 bottom
U$104  [#SERIAL#1]  56.9,34.8 90 bottom
U$105  [#I�C#0]  95,31.88 90 bottom
U$106  [#I�C_#0]  97.54,37.72 90 bottom
U$107  [GPS_0]  92.33,65.91 90 top
U$108  [LTE_1]  71.88,65.79 90 top
U$109  [#GND#0]  54.36,65.28 90 top
U$110  [#AUX#0]  56.9,65.28 90 top
U$111  [#1#1]  57.66,64.77 0 top
U$112  [#2#2]  57.53,62.23 0 top
U$113  [#3#3]  57.53,59.69 0 top
U$114  [#4#4]  57.53,57.15 0 top
U$115  [#EN#0]  57.53,54.61 0 top
U$116  [#RX#6]  57.53,52.07 0 top
U$117  [#TX#5]  57.4,49.53 0 top
U$118  [#RX#0]  57.53,46.99 0 top
U$119  [#TX#1]  57.4,44.45 0 top
U$120  [#ATTN#2]  57.4,41.91 0 top
U$121  [#SIM#0]  97.54,65.28 90 top
U$122  [#I�C_#0]  93.34,41.91 0 top
U$123  SPARKX-LOGO4  [SPARKX-MEDIUM]  88.65,21.59 0 top
U$124  SPARKX-LOGO4  [SPARKX-MEDIUM]  75.95,33.4 0 bottom
U$125  [RESET1]  138.43,26.42 90 top
U$126  [VIN1]  140.59,21.59 0 top
U$127  [CHG1]  99.7,19.05 0 top
U$128  [#GND#0]  100.58,65.28 90 bottom
U$129  [LIPO0]  114.68,13.59 90 top
U$130  [#MEAS#3]  118.75,22.23 0 bottom
U$131  [#RST#0]  135.51,24.13 0 bottom
U$132  [#VIN#1]  141.61,22.86 0 bottom
U$133  [#RX#0]  107.19,46.99 0 bottom
U$134  [#TX#1]  107.19,44.45 0 bottom
U$135  [#ATTN#2]  109.35,41.91 0 bottom
U$136  [GPS0]  137.92,59.18 0 top
U$137  [LTE1]  137.8,52.83 0 top
U$138  [#GND#0]  143.32,52.07 0 bottom
U$139  [#3V3#2]  143.26,44.45 0 bottom
U$140  [#GND#3]  143.26,41.91 0 bottom
U$141  [#SCL#1]  143,49.53 0 bottom
U$142  [#SDA#0]  143.13,46.99 0 bottom
U$143  [#VACT_GPS#0]  125.22,39.37 0 bottom
U$144  [#SIM_CD#0]  135.38,39.37 0 bottom
U$145  [SIM_HOLDER0]  125.35,41.27 0 bottom
U$146  [CELLULAR1]  129.54,17.27 0 top
U$147  [QWIIC0]  130.94,19.18 0 top
U$148  [#1#1]  105.92,64.77 0 bottom
U$149  [#2#2]  106.05,62.23 0 bottom
U$150  [#3#3]  106.05,59.69 0 bottom
U$151  [#4#4]  106.05,57.15 0 bottom
U$152  [#AUX#0]  103.12,65.28 90 bottom
U$153  [#RX#6]  107.19,52.07 0 bottom
U$154  [#TX#5]  107.19,49.53 0 bottom
U$155  [#EN#0]  107.06,54.61 0 bottom
U$156  [#VIN#0]  100.58,37.21 90 bottom
U$157  [QWIIC0]  126.11,30.99 0 bottom
U$158  [CELLULAR1]  127.64,29.08 0 bottom
U$159  [NOTEPAD0]  118.36,60.96 0 top
U$160  [#1V8#4]  143.26,64.77 0 bottom
U$161  [##CD##1]  143.26,54.61 0 bottom
U$162  [#CLK#3]  143.26,57.15 0 bottom
U$163  [#IO#2]  143,59.69 0 bottom
U$164  [#RST#5]  143.26,62.23 0 bottom
U$165  [#SIM#0]  143.76,65.28 90 bottom
U$166  [#SERIAL#1]  103.12,34.8 90 bottom
U$167  [#I�C#0]  141.22,31.88 90 bottom
U$168  [#I�C_#0]  143.76,37.72 90 bottom
U$169  [GPS_0]  138.56,65.91 90 top
U$170  [LTE_1]  118.11,65.79 90 top
U$171  [#GND#0]  100.58,65.28 90 top
U$172  [#AUX#0]  103.12,65.28 90 top
U$173  [#1#1]  103.89,64.77 0 top
U$174  [#2#2]  103.76,62.23 0 top
U$175  [#3#3]  103.76,59.69 0 top
U$176  [#4#4]  103.76,57.15 0 top
U$177  [#EN#0]  103.76,54.61 0 top
U$178  [#RX#6]  103.76,52.07 0 top
U$179  [#TX#5]  103.63,49.53 0 top
U$180  [#RX#0]  103.76,46.99 0 top
U$181  [#TX#1]  103.63,44.45 0 top
U$182  [#ATTN#2]  103.63,41.91 0 top
U$183  [#SIM#0]  143.76,65.28 90 top
U$184  [#I�C_#0]  139.57,41.91 0 top
U$185  SPARKX-LOGO4  [SPARKX-MEDIUM]  134.87,21.59 0 top
U$186  SPARKX-LOGO4  [SPARKX-MEDIUM]  122.17,33.4 0 bottom
U$187  [RESET1]  45.97,93.73 90 top
U$188  [VIN1]  48.13,88.9 0 top
U$189  [CHG1]  7.24,86.36 0 top
U$190  [#GND#0]  8.13,132.59 90 bottom
U$191  [LIPO0]  22.23,80.9 90 top
U$192  [#MEAS#3]  26.29,89.53 0 bottom
U$193  [#RST#0]  43.05,91.44 0 bottom
U$194  [#VIN#1]  49.15,90.17 0 bottom
U$195  [#RX#0]  14.73,114.3 0 bottom
U$196  [#TX#1]  14.73,111.76 0 bottom
U$197  [#ATTN#2]  16.89,109.22 0 bottom
U$198  [GPS0]  45.47,126.49 0 top
U$199  [LTE1]  45.34,120.14 0 top
U$200  [#GND#0]  50.86,119.38 0 bottom
U$201  [#3V3#2]  50.8,111.76 0 bottom
U$202  [#GND#3]  50.8,109.22 0 bottom
U$203  [#SCL#1]  50.55,116.84 0 bottom
U$204  [#SDA#0]  50.67,114.3 0 bottom
U$205  [#VACT_GPS#0]  32.77,106.68 0 bottom
U$206  [#SIM_CD#0]  42.93,106.68 0 bottom
U$207  [SIM_HOLDER0]  32.89,108.58 0 bottom
U$208  [CELLULAR1]  37.08,84.58 0 top
U$209  [QWIIC0]  38.48,86.49 0 top
U$210  [#1#1]  13.46,132.08 0 bottom
U$211  [#2#2]  13.59,129.54 0 bottom
U$212  [#3#3]  13.59,127 0 bottom
U$213  [#4#4]  13.59,124.46 0 bottom
U$214  [#AUX#0]  10.67,132.59 90 bottom
U$215  [#RX#6]  14.73,119.38 0 bottom
U$216  [#TX#5]  14.73,116.84 0 bottom
U$217  [#EN#0]  14.61,121.92 0 bottom
U$218  [#VIN#0]  8.13,104.52 90 bottom
U$219  [QWIIC0]  33.66,98.3 0 bottom
U$220  [CELLULAR1]  35.18,96.39 0 bottom
U$221  [NOTEPAD0]  25.91,128.27 0 top
U$222  [#1V8#4]  50.8,132.08 0 bottom
U$223  [##CD##1]  50.8,121.92 0 bottom
U$224  [#CLK#3]  50.8,124.46 0 bottom
U$225  [#IO#2]  50.55,127 0 bottom
U$226  [#RST#5]  50.8,129.54 0 bottom
U$227  [#SIM#0]  51.31,132.59 90 bottom
U$228  [#SERIAL#1]  10.67,102.11 90 bottom
U$229  [#I�C#0]  48.77,99.19 90 bottom
U$230  [#I�C_#0]  51.31,105.03 90 bottom
U$231  [GPS_0]  46.1,133.22 90 top
U$232  [LTE_1]  25.65,133.1 90 top
U$233  [#GND#0]  8.13,132.59 90 top
U$234  [#AUX#0]  10.67,132.59 90 top
U$235  [#1#1]  11.43,132.08 0 top
U$236  [#2#2]  11.3,129.54 0 top
U$237  [#3#3]  11.3,127 0 top
U$238  [#4#4]  11.3,124.46 0 top
U$239  [#EN#0]  11.3,121.92 0 top
U$240  [#RX#6]  11.3,119.38 0 top
U$241  [#TX#5]  11.18,116.84 0 top
U$242  [#RX#0]  11.3,114.3 0 top
U$243  [#TX#1]  11.18,111.76 0 top
U$244  [#ATTN#2]  11.18,109.22 0 top
U$245  [#SIM#0]  51.31,132.59 90 top
U$246  [#I�C_#0]  47.12,109.22 0 top
U$247  SPARKX-LOGO4  [SPARKX-MEDIUM]  42.42,88.9 0 top
U$248  SPARKX-LOGO4  [SPARKX-MEDIUM]  29.72,100.71 0 bottom
U$249  [RESET1]  92.2,93.73 90 top
U$250  [VIN1]  94.36,88.9 0 top
U$251  [CHG1]  53.47,86.36 0 top
U$252  [#GND#0]  54.36,132.59 90 bottom
U$253  [LIPO0]  68.45,80.9 90 top
U$254  [#MEAS#3]  72.52,89.53 0 bottom
U$255  [#RST#0]  89.28,91.44 0 bottom
U$256  [#VIN#1]  95.38,90.17 0 bottom
U$257  [#RX#0]  60.96,114.3 0 bottom
U$258  [#TX#1]  60.96,111.76 0 bottom
U$259  [#ATTN#2]  63.12,109.22 0 bottom
U$260  [GPS0]  91.69,126.49 0 top
U$261  [LTE1]  91.57,120.14 0 top
U$262  [#GND#0]  97.09,119.38 0 bottom
U$263  [#3V3#2]  97.03,111.76 0 bottom
U$264  [#GND#3]  97.03,109.22 0 bottom
U$265  [#SCL#1]  96.77,116.84 0 bottom
U$266  [#SDA#0]  96.9,114.3 0 bottom
U$267  [#VACT_GPS#0]  78.99,106.68 0 bottom
U$268  [#SIM_CD#0]  89.15,106.68 0 bottom
U$269  [SIM_HOLDER0]  79.12,108.58 0 bottom
U$270  [CELLULAR1]  83.31,84.58 0 top
U$271  [QWIIC0]  84.71,86.49 0 top
U$272  [#1#1]  59.69,132.08 0 bottom
U$273  [#2#2]  59.82,129.54 0 bottom
U$274  [#3#3]  59.82,127 0 bottom
U$275  [#4#4]  59.82,124.46 0 bottom
U$276  [#AUX#0]  56.9,132.59 90 bottom
U$277  [#RX#6]  60.96,119.38 0 bottom
U$278  [#TX#5]  60.96,116.84 0 bottom
U$279  [#EN#0]  60.83,121.92 0 bottom
U$280  [#VIN#0]  54.36,104.52 90 bottom
U$281  [QWIIC0]  79.88,98.3 0 bottom
U$282  [CELLULAR1]  81.41,96.39 0 bottom
U$283  [NOTEPAD0]  72.14,128.27 0 top
U$284  [#1V8#4]  97.03,132.08 0 bottom
U$285  [##CD##1]  97.03,121.92 0 bottom
U$286  [#CLK#3]  97.03,124.46 0 bottom
U$287  [#IO#2]  96.77,127 0 bottom
U$288  [#RST#5]  97.03,129.54 0 bottom
U$289  [#SIM#0]  97.54,132.59 90 bottom
U$290  [#SERIAL#1]  56.9,102.11 90 bottom
U$291  [#I�C#0]  95,99.19 90 bottom
U$292  [#I�C_#0]  97.54,105.03 90 bottom
U$293  [GPS_0]  92.33,133.22 90 top
U$294  [LTE_1]  71.88,133.1 90 top
U$295  [#GND#0]  54.36,132.59 90 top
U$296  [#AUX#0]  56.9,132.59 90 top
U$297  [#1#1]  57.66,132.08 0 top
U$298  [#2#2]  57.53,129.54 0 top
U$299  [#3#3]  57.53,127 0 top
U$300  [#4#4]  57.53,124.46 0 top
U$301  [#EN#0]  57.53,121.92 0 top
U$302  [#RX#6]  57.53,119.38 0 top
U$303  [#TX#5]  57.4,116.84 0 top
U$304  [#RX#0]  57.53,114.3 0 top
U$305  [#TX#1]  57.4,111.76 0 top
U$306  [#ATTN#2]  57.4,109.22 0 top
U$307  [#SIM#0]  97.54,132.59 90 top
U$308  [#I�C_#0]  93.34,109.22 0 top
U$309  SPARKX-LOGO4  [SPARKX-MEDIUM]  88.65,88.9 0 top
U$310  SPARKX-LOGO4  [SPARKX-MEDIUM]  75.95,100.71 0 bottom
U$311  [RESET1]  138.43,93.73 90 top
U$312  [VIN1]  140.59,88.9 0 top
U$313  [CHG1]  99.7,86.36 0 top
U$314  [#GND#0]  100.58,132.59 90 bottom
U$315  [LIPO0]  114.68,80.9 90 top
U$316  [#MEAS#3]  118.75,89.53 0 bottom
U$317  [#RST#0]  135.51,91.44 0 bottom
U$318  [#VIN#1]  141.61,90.17 0 bottom
U$319  [#RX#0]  107.19,114.3 0 bottom
U$320  [#TX#1]  107.19,111.76 0 bottom
U$321  [#ATTN#2]  109.35,109.22 0 bottom
U$322  [GPS0]  137.92,126.49 0 top
U$323  [LTE1]  137.8,120.14 0 top
U$324  [#GND#0]  143.32,119.38 0 bottom
U$325  [#3V3#2]  143.26,111.76 0 bottom
U$326  [#GND#3]  143.26,109.22 0 bottom
U$327  [#SCL#1]  143,116.84 0 bottom
U$328  [#SDA#0]  143.13,114.3 0 bottom
U$329  [#VACT_GPS#0]  125.22,106.68 0 bottom
U$330  [#SIM_CD#0]  135.38,106.68 0 bottom
U$331  [SIM_HOLDER0]  125.35,108.58 0 bottom
U$332  [CELLULAR1]  129.54,84.58 0 top
U$333  [QWIIC0]  130.94,86.49 0 top
U$334  [#1#1]  105.92,132.08 0 bottom
U$335  [#2#2]  106.05,129.54 0 bottom
U$336  [#3#3]  106.05,127 0 bottom
U$337  [#4#4]  106.05,124.46 0 bottom
U$338  [#AUX#0]  103.12,132.59 90 bottom
U$339  [#RX#6]  107.19,119.38 0 bottom
U$340  [#TX#5]  107.19,116.84 0 bottom
U$341  [#EN#0]  107.06,121.92 0 bottom
U$342  [#VIN#0]  100.58,104.52 90 bottom
U$343  [QWIIC0]  126.11,98.3 0 bottom
U$344  [CELLULAR1]  127.64,96.39 0 bottom
U$345  [NOTEPAD0]  118.36,128.27 0 top
U$346  [#1V8#4]  143.26,132.08 0 bottom
U$347  [##CD##1]  143.26,121.92 0 bottom
U$348  [#CLK#3]  143.26,124.46 0 bottom
U$349  [#IO#2]  143,127 0 bottom
U$350  [#RST#5]  143.26,129.54 0 bottom
U$351  [#SIM#0]  143.76,132.59 90 bottom
U$352  [#SERIAL#1]  103.12,102.11 90 bottom
U$353  [#I�C#0]  141.22,99.19 90 bottom
U$354  [#I�C_#0]  143.76,105.03 90 bottom
U$355  [GPS_0]  138.56,133.22 90 top
U$356  [LTE_1]  118.11,133.1 90 top
U$357  [#GND#0]  100.58,132.59 90 top
U$358  [#AUX#0]  103.12,132.59 90 top
U$359  [#1#1]  103.89,132.08 0 top
U$360  [#2#2]  103.76,129.54 0 top
U$361  [#3#3]  103.76,127 0 top
U$362  [#4#4]  103.76,124.46 0 top
U$363  [#EN#0]  103.76,121.92 0 top
U$364  [#RX#6]  103.76,119.38 0 top
U$365  [#TX#5]  103.63,116.84 0 top
U$366  [#RX#0]  103.76,114.3 0 top
U$367  [#TX#1]  103.63,111.76 0 top
U$368  [#ATTN#2]  103.63,109.22 0 top
U$369  [#SIM#0]  143.76,132.59 90 top
U$370  [#I�C_#0]  139.57,109.22 0 top
U$371  SPARKX-LOGO4  [SPARKX-MEDIUM]  134.87,88.9 0 top
U$372  SPARKX-LOGO4  [SPARKX-MEDIUM]  122.17,100.71 0 bottom
VIN_LED  [SMT-JUMPER_2_NC_TRACE_SILK]  50.04,22.86 0 bottom
VIN_LED1  [SMT-JUMPER_2_NC_TRACE_SILK]  96.27,22.86 0 bottom
VIN_LED2  [SMT-JUMPER_2_NC_TRACE_SILK]  142.49,22.86 0 bottom
VIN_LED3  [SMT-JUMPER_2_NC_TRACE_SILK]  50.04,90.17 0 bottom
VIN_LED4  [SMT-JUMPER_2_NC_TRACE_SILK]  96.27,90.17 0 bottom
VIN_LED5  [SMT-JUMPER_2_NC_TRACE_SILK]  142.49,90.17 0 bottom

## Library data of the parts
C1 C4 C15 C25 C33 C41 = SparkFun-Capacitors; PROD_ID: CAP-08280
C2 C3 C16 C26 C34 C42 = SparkFun-Capacitors; PROD_ID: CAP-14106
C5 C9 C19 C27 C35 C43 = SparkFun-Capacitors; PROD_ID: CAP-00868
C6 C10 C20 C28 C36 C44 = SparkFun-Capacitors; PROD_ID: CAP-00810
C7 C11 C21 C29 C37 C45 = SparkFun-Capacitors; PROD_ID: CAP-07822
C8 C12 C22 C30 C38 C46 = SparkFun-Capacitors; PROD_ID: CAP-10790
C13 C14 C17 C18 C23 C24 C31 C32 C39 C40 C47 C48 = SparkFun-Capacitors; PROD_ID: CAP-13930
D1 D4 D6 D8-D10 D13-D15 D18-D20 D23-D25 D28-D30 = SparkFun-DiscreteSemi; PROD_ID: DIO-14072
D2 D3 D11 D16 D21 D26 = SparkFun-LED; PROD_ID: DIO-09003
D5 D7 D12 D17 D22 D27 = SparkFun-LED; PROD_ID: DIO-00819
E1-E12 = SparkFun-RF; PROD_ID: CONN-15100
E$1-E$4 FD1-FD24 LOGO1-LOGO18 = SparkFun-Aesthetics
E$5 E$6 = SparkFun-Retired
H1-H4 H6-H9 H11-H14 H16-H19 H21-H24 H26-H29 = SparkFun-Hardware
H5 H10 H15 H20 H25 H30 = SparkFun-Hardware; PROD_ID: HW-14899
J1 J11 J31 J46 J61 J76 = SparkFun-Connectors; PROD_ID: CONN-14122
J2 J5-J7 J9 J13 J14 J16 J18 J20-J23 J28-J30 J33 J35-J38 J43-J45 J48 J50-J53 J58-J60 J63 J65-J68 J73-J75 J78 J80-J83 J88-J90 = SparkFun-Connectors
J3 J8 J17 J24 J32 J39 J47 J54 J62 J69 J77 J84 = SparkFun-Connectors; PROD_ID: CONN-13694
J4 J19 J34 J49 J64 J79 = SparkFun-Connectors; PROD_ID: CONN-11443; SF_ID: PRT-08612
J10 J12 J25 J26 J40 J41 J55 J56 J70 J71 J85 J86 = SparkFun-Connectors; PROD_ID: CONN-09193; SF_ID: WRL-09144
J15 J27 J42 J57 J72 J87 = SparkFun-Connectors; PROD_ID: CONN-08536; SF_ID: PRT-00548
JP1-JP12 MEAS MEAS1-MEAS5 SIM SIM1-SIM5 VIN_LED VIN_LED1-VIN_LED5 = SparkFun-Jumpers
R1 R4 R6 R10 R12 R13 R19-R21 R27-R29 R35-R37 R43-R45 = SparkFun-Resistors; PROD_ID: RES-08272
R2 R3 R5 R9 R17 R18 R25 R26 R33 R34 R41 R42 = SparkFun-Resistors; PROD_ID: RES-12083
R7 R11 R14 R15 R22 R23 R30 R31 R38 R39 R46 R47 = SparkFun-Resistors; PROD_ID: RES-07856
R8 R16 R24 R32 R40 R48 = SparkFun-Resistors; PROD_ID: RES-00824
S1-S6 = SparkFun-Switches; PROD_ID: SWCH-14139
U1 U6 U9 U12 U15 U18 = SparkFun-IC-Power; PROD_ID: IC-15779
U2 U3 U7 U10 U13 U16 = SparkFun-IC-Power; PROD_ID: IC-09995
U4 U5 U8 U11 U14 U17 = Notecard
U$1-U$55 U$58-U$122 U$125-U$184 U$187-U$246 U$249-U$308 U$311-U$370 = output
U$56 U$57 U$123 U$124 U$185 U$186 U$247 U$248 U$309 U$310 U$371 U$372 = SparkX

## Nets
3.3V: D6.A J3.2 J8.2 J14.2 JP1.2
3.3V1: D10.A J17.2 J18.2 J24.2 JP3.2
3.3V2: D15.A J32.2 J33.2 J39.2 JP5.2
3.3V3: D20.A J47.2 J48.2 J54.2 JP7.2
3.3V4: D25.A J62.2 J63.2 J69.2 JP9.2
3.3V5: D30.A J77.2 J78.2 J84.2 JP11.2
!RESET!: J13.1 S1.3 S1.4 U4.67
!RESET!1: J22.1 S2.3 S2.4 U5.67
!RESET!2: J37.1 S3.3 S3.4 U8.67
!RESET!3: J52.1 S4.3 S4.4 U11.67
!RESET!4: J67.1 S5.3 S5.4 U14.67
!RESET!5: J82.1 S6.3 S6.4 U17.67
ATTN: J9.1 U4.54
ATTN1: J21.1 U5.54
ATTN2: J36.1 U8.54
ATTN3: J51.1 U11.54
ATTN4: J66.1 U14.54
ATTN5: J81.1 U17.54
AUX1: J16.1 U4.46
AUX2: J16.2 U4.48
AUX3: J16.3 U4.50
AUX4: J16.4 U4.52
AUX5: J28.1 U5.46
AUX6: J28.2 U5.48
AUX7: J28.3 U5.50
AUX8: J28.4 U5.52
AUX9: J43.1 U8.46
AUX10: J43.2 U8.48
AUX11: J43.3 U8.50
AUX12: J43.4 U8.52
AUX13: J58.1 U11.46
AUX14: J58.2 U11.48
AUX15: J58.3 U11.50
AUX16: J58.4 U11.52
AUX17: J73.1 U14.46
AUX18: J73.2 U14.48
AUX19: J73.3 U14.50
AUX20: J73.4 U14.52
AUX21: J88.1 U17.46
AUX22: J88.2 U17.48
AUX23: J88.3 U17.50
AUX24: J88.4 U17.52
AUX_EN: J16.5 U4.56
AUX_EN1: J28.5 U5.56
AUX_EN2: J43.5 U8.56
AUX_EN3: J58.5 U11.56
AUX_EN4: J73.5 U14.56
AUX_EN5: J88.5 U17.56
AUX_RX: J16.6 U4.58
AUX_RX1: J28.6 U5.58
AUX_RX2: J43.6 U8.58
AUX_RX3: J58.6 U11.58
AUX_RX4: J73.6 U14.58
AUX_RX5: J88.6 U17.58
AUX_TX: J16.7 U4.60
AUX_TX1: J28.7 U5.60
AUX_TX2: J43.7 U8.60
AUX_TX3: J58.7 U11.60
AUX_TX4: J73.7 U14.60
AUX_TX5: J88.7 U17.60
CHG_LED: R7.1 U2.1
CHG_LED1: R14.1 U3.1
CHG_LED2: R22.1 U7.1
CHG_LED3: R30.1 U10.1
CHG_LED4: R38.1 U13.1
CHG_LED5: R46.1 U16.1
GND: C3.2 C4.2 C5.2 C6.2 C7.2 C8.C C17.2 C18.2 D5.C E3.GND@0 E3.GND@1 E4.GND@0 E4.GND@1 H5.1 J1.GND J1.GND2 J3.1 J4.1 J5.6 J5.7 J5.8 J5.9 J5.10 J6.6 J7.2 J8.1 J10.1 J10.2 J12.1 J12.2 J14.1 J15.C5 R2.1 R3.1 R6.1 S1.1 S1.2 SIM.1 U1.2 U2.2 U4.3 U4.5 U4.6 U4.11 U4.18 U4.33 U4.39 U4.45 U4.51 U4.57 U4.71 U4.73
GND1: C1.2 C2.2 C9.2 C10.2 C11.2 C12.C C13.2 C14.2 D7.C E1.GND@0 E1.GND@1 E2.GND@0 E2.GND@1 H10.1 J11.GND J11.GND2 J17.1 J18.1 J19.1 J20.2 J23.6 J24.1 J25.1 J25.2 J26.1 J26.2 J27.C5 J30.6 J30.7 J30.8 J30.9 J30.10 R5.1 R9.1 R13.1 S2.1 S2.2 SIM1.1 U3.2 U5.3 U5.5 U5.6 U5.11 U5.18 U5.33 U5.39 U5.45 U5.51 U5.57 U5.71 U5.73 U6.2
GND2: C15.2 C16.2 C19.2 C20.2 C21.2 C22.C C23.2 C24.2 D12.C E5.GND@0 E5.GND@1 E6.GND@0 E6.GND@1 H15.1 J31.GND J31.GND2 J32.1 J33.1 J34.1 J35.2 J38.6 J39.1 J40.1 J40.2 J41.1 J41.2 J42.C5 J45.6 J45.7 J45.8 J45.9 J45.10 R17.1 R18.1 R21.1 S3.1 S3.2 SIM2.1 U7.2 U8.3 U8.5 U8.6 U8.11 U8.18 U8.33 U8.39 U8.45 U8.51 U8.57 U8.71 U8.73 U9.2
GND3: C25.2 C26.2 C27.2 C28.2 C29.2 C30.C C31.2 C32.2 D17.C E7.GND@0 E7.GND@1 E8.GND@0 E8.GND@1 H20.1 J46.GND J46.GND2 J47.1 J48.1 J49.1 J50.2 J53.6 J54.1 J55.1 J55.2 J56.1 J56.2 J57.C5 J60.6 J60.7 J60.8 J60.9 J60.10 R25.1 R26.1 R29.1 S4.1 S4.2 SIM3.1 U10.2 U11.3 U11.5 U11.6 U11.11 U11.18 U11.33 U11.39 U11.45 U11.51 U11.57 U11.71 U11.73 U12.2
GND4: C33.2 C34.2 C35.2 C36.2 C37.2 C38.C C39.2 C40.2 D22.C E9.GND@0 E9.GND@1 E10.GND@0 E10.GND@1 H25.1 J61.GND J61.GND2 J62.1 J63.1 J64.1 J65.2 J68.6 J69.1 J70.1 J70.2 J71.1 J71.2 J72.C5 J75.6 J75.7 J75.8 J75.9 J75.10 R33.1 R34.1 R37.1 S5.1 S5.2 SIM4.1 U13.2 U14.3 U14.5 U14.6 U14.11 U14.18 U14.33 U14.39 U14.45 U14.51 U14.57 U14.71 U14.73 U15.2
GND5: C41.2 C42.2 C43.2 C44.2 C45.2 C46.C C47.2 C48.2 D27.C E11.GND@0 E11.GND@1 E12.GND@0 E12.GND@1 H30.1 J76.GND J76.GND2 J77.1 J78.1 J79.1 J80.2 J83.6 J84.1 J85.1 J85.2 J86.1 J86.2 J87.C5 J90.6 J90.7 J90.8 J90.9 J90.10 R41.1 R42.1 R45.1 S6.1 S6.2 SIM5.1 U16.2 U17.3 U17.5 U17.6 U17.11 U17.18 U17.33 U17.39 U17.45 U17.51 U17.57 U17.71 U17.73 U18.2
N$1: J11.A5 R5.2
N$2: JP1.3 R4.2
N$3: JP1.1 R1.2
N$4: D2.C R7.2
N$5: D5.A R11.1
N$6: R11.2 VIN_LED.1
N$7: R6.2 U2.5
N$8: J11.B5 R9.2
N$9: JP3.3 R12.2
N$10: J1.A5 R2.2
N$11: J1.B5 R3.2
N$12: JP3.1 R10.2
N$13: R13.2 U3.5
N$14: D3.C R14.2
N$15: R15.2 VIN_LED1.1
N$16: D7.A R15.1
N$17: J31.A5 R17.2
N$18: J31.B5 R18.2
N$19: JP5.3 R20.2
N$20: JP5.1 R19.2
N$21: R21.2 U7.5
N$22: D11.C R22.2
N$23: R23.2 VIN_LED2.1
N$24: D12.A R23.1
N$25: J46.A5 R25.2
N$26: J46.B5 R26.2
N$27: JP7.3 R28.2
N$28: JP7.1 R27.2
N$29: R29.2 U10.5
N$30: D16.C R30.2
N$31: R31.2 VIN_LED3.1
N$32: D17.A R31.1
N$33: J61.A5 R33.2
N$34: J61.B5 R34.2
N$35: JP9.3 R36.2
N$36: JP9.1 R35.2
N$37: R37.2 U13.5
N$38: D21.C R38.2
N$39: R39.2 VIN_LED4.1
N$40: D22.A R39.1
N$41: J76.A5 R41.2
N$42: J76.B5 R42.2
N$43: JP11.3 R44.2
N$44: JP11.1 R43.2
N$45: R45.2 U16.5
N$46: D26.C R46.2
N$47: R47.2 VIN_LED5.1
N$48: D27.A R47.1
RF_GPS: E4.SIG J10.FEED
RF_GPS1: E2.SIG J25.FEED
RF_GPS2: E6.SIG J40.FEED
RF_GPS3: E8.SIG J55.FEED
RF_GPS4: E10.SIG J70.FEED
RF_GPS5: E12.SIG J85.FEED
RF_LTE: E3.SIG J12.FEED
RF_LTE1: E1.SIG J26.FEED
RF_LTE2: E5.SIG J41.FEED
RF_LTE3: E7.SIG J56.FEED
RF_LTE4: E9.SIG J71.FEED
RF_LTE5: E11.SIG J86.FEED
RX: J2.1 U4.62
RX1: J29.1 U5.62
RX2: J44.1 U8.62
RX3: J59.1 U11.62
RX4: J74.1 U14.62
RX5: J89.1 U17.62
SCL: J3.4 J8.4 J14.4 R4.1 U4.40
SCL1: J17.4 J18.4 J24.4 R12.1 U5.40
SCL2: J32.4 J33.4 J39.4 R20.1 U8.40
SCL3: J47.4 J48.4 J54.4 R28.1 U11.40
SCL4: J62.4 J63.4 J69.4 R36.1 U14.40
SCL5: J77.4 J78.4 J84.4 R44.1 U17.40
SDA: J3.3 J8.3 J14.3 R1.1 U4.42
SDA1: J17.3 J18.3 J24.3 R10.1 U5.42
SDA2: J32.3 J33.3 J39.3 R19.1 U8.42
SDA3: J47.3 J48.3 J54.3 R27.1 U11.42
SDA4: J62.3 J63.3 J69.3 R35.1 U14.42
SDA5: J77.3 J78.3 J84.3 R43.1 U17.42
SIM_!CD!: J6.5 R8.1 SIM.2 U4.16
SIM_!CD!1: J23.5 R16.1 SIM1.2 U5.16
SIM_!CD!2: J38.5 R24.1 SIM2.2 U8.16
SIM_!CD!3: J53.5 R32.1 SIM3.2 U11.16
SIM_!CD!4: J68.5 R40.1 SIM4.2 U14.16
SIM_!CD!5: J83.5 R48.1 SIM5.2 U17.16
SIM_CLK: J6.4 J15.C3 U4.14
SIM_CLK1: J23.4 J27.C3 U5.14
SIM_CLK2: J38.4 J42.C3 U8.14
SIM_CLK3: J53.4 J57.C3 U11.14
SIM_CLK4: J68.4 J72.C3 U14.14
SIM_CLK5: J83.4 J87.C3 U17.14
SIM_IO: J6.3 J15.C7 U4.12
SIM_IO1: J23.3 J27.C7 U5.12
SIM_IO2: J38.3 J42.C7 U8.12
SIM_IO3: J53.3 J57.C7 U11.12
SIM_IO4: J68.3 J72.C7 U14.12
SIM_IO5: J83.3 J87.C7 U17.12
SIM_RST: J6.2 J15.C2 U4.10
SIM_RST1: J23.2 J27.C2 U5.10
SIM_RST2: J38.2 J42.C2 U8.10
SIM_RST3: J53.2 J57.C2 U11.10
SIM_RST4: J68.2 J72.C2 U14.10
SIM_RST5: J83.2 J87.C2 U17.10
SIM_VCC: J6.1 J15.C1 R8.2 U4.8
SIM_VCC1: J23.1 J27.C1 R16.2 U5.8
SIM_VCC2: J38.1 J42.C1 R24.2 U8.8
SIM_VCC3: J53.1 J57.C1 R32.2 U11.8
SIM_VCC4: J68.1 J72.C1 R40.2 U14.8
SIM_VCC5: J83.1 J87.C1 R48.2 U17.8
TX: J2.2 U4.64
TX1: J29.2 U5.64
TX2: J44.2 U8.64
TX3: J59.2 U11.64
TX4: J74.2 U14.64
TX5: J89.2 U17.64
USB_D+: J1.A6 J1.B6 U4.7
USB_D+1: J11.A6 J11.B6 U5.7
USB_D+2: J31.A6 J31.B6 U8.7
USB_D+3: J46.A6 J46.B6 U11.7
USB_D+4: J61.A6 J61.B6 U14.7
USB_D+5: J76.A6 J76.B6 U17.7
USB_D-: J1.A7 J1.B7 U4.9
USB_D-1: J11.A7 J11.B7 U5.9
USB_D-2: J31.A7 J31.B7 U8.9
USB_D-3: J46.A7 J46.B7 U11.9
USB_D-4: J61.A7 J61.B7 U14.9
USB_D-5: J76.A7 J76.B7 U17.9
V_BATT: C4.1 D4.A J4.2 J7.1 U2.3
V_BATT1: C1.1 D9.A J19.2 J20.1 U3.3
V_BATT2: C15.1 D14.A J34.2 J35.1 U7.3
V_BATT3: C25.1 D19.A J49.2 J50.1 U10.3
V_BATT4: C33.1 D24.A J64.2 J65.1 U13.3
V_BATT5: C41.1 D29.A J79.2 J80.1 U16.3
V_USB: C3.1 D1.A D2.A J1.VBUS1 J1.VBUS2 U2.4 U4.13
V_USB1: C2.1 D3.A D8.A J11.VBUS1 J11.VBUS2 U3.4 U5.13
V_USB2: C16.1 D11.A D13.A J31.VBUS1 J31.VBUS2 U7.4 U8.13
V_USB3: C26.1 D16.A D18.A J46.VBUS1 J46.VBUS2 U10.4 U11.13
V_USB4: C34.1 D21.A D23.A J61.VBUS1 J61.VBUS2 U13.4 U14.13
V_USB5: C42.1 D26.A D28.A J76.VBUS1 J76.VBUS2 U16.4 U17.13
VACT_GPS_IN: JP2.2 U4.22
VACT_GPS_IN1: JP4.2 U5.22
VACT_GPS_IN2: JP6.2 U8.22
VACT_GPS_IN3: JP8.2 U11.22
VACT_GPS_IN4: JP10.2 U14.22
VACT_GPS_IN5: JP12.2 U17.22
VACT_GPS_OUT: JP2.1 U4.20
VACT_GPS_OUT1: JP4.1 U5.20
VACT_GPS_OUT2: JP6.1 U8.20
VACT_GPS_OUT3: JP8.1 U11.20
VACT_GPS_OUT4: JP10.1 U14.20
VACT_GPS_OUT5: JP12.1 U17.20
VIN: C5.1 C6.1 C7.1 C8.A C17.1 J5.1 J5.2 J5.3 J5.4 J5.5 MEAS.2 MEAS.4 U1.1 U1.3 U4.70 U4.72 U4.74 VIN_LED.2
VIN1: D1.C D4.C D6.C MEAS.1 MEAS.3
VIN2: C9.1 C10.1 C11.1 C12.A C13.1 J30.1 J30.2 J30.3 J30.4 J30.5 MEAS1.2 MEAS1.4 U5.70 U5.72 U5.74 U6.1 U6.3 VIN_LED1.2
VIN3: D8.C D9.C D10.C MEAS1.1 MEAS1.3
VIN4: C19.1 C20.1 C21.1 C22.A C23.1 J45.1 J45.2 J45.3 J45.4 J45.5 MEAS2.2 MEAS2.4 U8.70 U8.72 U8.74 U9.1 U9.3 VIN_LED2.2
VIN5: D13.C D14.C D15.C MEAS2.1 MEAS2.3
VIN6: C27.1 C28.1 C29.1 C30.A C31.1 J60.1 J60.2 J60.3 J60.4 J60.5 MEAS3.2 MEAS3.4 U11.70 U11.72 U11.74 U12.1 U12.3 VIN_LED3.2
VIN7: D18.C D19.C D20.C MEAS3.1 MEAS3.3
VIN8: C35.1 C36.1 C37.1 C38.A C39.1 J75.1 J75.2 J75.3 J75.4 J75.5 MEAS4.2 MEAS4.4 U14.70 U14.72 U14.74 U15.1 U15.3 VIN_LED4.2
VIN9: D23.C D24.C D25.C MEAS4.1 MEAS4.3
VIN10: C43.1 C44.1 C45.1 C46.A C47.1 J90.1 J90.2 J90.3 J90.4 J90.5 MEAS5.2 MEAS5.4 U17.70 U17.72 U17.74 U18.1 U18.3 VIN_LED5.2
VIN11: D28.C D29.C D30.C MEAS5.1 MEAS5.3
VIO [power]: C18.1 U1.5 U4.2 U4.4
VIO1 [power]: C14.1 U5.2 U5.4 U6.5
VIO2 [power]: C24.1 U8.2 U8.4 U9.5
VIO3 [power]: C32.1 U11.2 U11.4 U12.5
VIO4 [power]: C40.1 U14.2 U14.4 U15.5
VIO5 [power]: C48.1 U17.2 U17.4 U18.5

## Tracks (layer width: path | path; a pad name or v marks a point on that pad's centre or on a via)
3.3V  (via drill 0.3)
  Top 0.178: v51.43,36.83 50.93,36.33 J8.2
  Top 0.559: J3.2 14.87,37.33 v14.99,37.21 | J8.2 v45.73,36.33 v45.72,36.32 45.72,23.88 43.55,21.71 D6.A
  Bottom 0.178: JP1.2 v51.43,36.83 51.43,38.61 49.76,40.28 49.76,42.9 J14.2
  Bottom 0.559: v14.99,37.21 15.62,37.85 44.2,37.85 v45.72,36.32
3.3V1  (via drill 0.3)
  Top 0.178: v97.66,36.83 97.16,36.33 J24.2
  Top 0.559: J17.2 61.09,37.33 v61.21,37.21 | J24.2 v91.96,36.33 v91.95,36.32 91.95,23.88 89.78,21.71 D10.A
  Bottom 0.178: JP3.2 v97.66,36.83 97.66,38.61 95.99,40.28 95.99,42.9 J18.2
  Bottom 0.559: v61.21,37.21 61.85,37.85 90.42,37.85 v91.95,36.32
3.3V2  (via drill 0.3)
  Top 0.178: v143.89,36.83 143.39,36.33 J39.2
  Top 0.559: J32.2 107.32,37.33 v107.44,37.21 | J39.2 v138.18,36.33 v138.18,36.32 138.18,23.88 136.01,21.71 D15.A
  Bottom 0.178: JP5.2 v143.89,36.83 143.89,38.61 142.22,40.28 142.22,42.9 J33.2
  Bottom 0.559: v107.44,37.21 108.08,37.85 136.65,37.85 v138.18,36.32
3.3V3  (via drill 0.3)
  Top 0.178: v51.43,104.14 50.93,103.64 J54.2
  Top 0.559: J47.2 14.87,104.64 v14.99,104.52 | J54.2 v45.73,103.64 v45.72,103.63 45.72,91.19 43.55,89.02 D20.A
  Bottom 0.178: JP7.2 v51.43,104.14 51.43,105.92 49.76,107.59 49.76,110.21 J48.2
  Bottom 0.559: v14.99,104.52 15.62,105.16 44.2,105.16 v45.72,103.63
3.3V4  (via drill 0.3)
  Top 0.178: v97.66,104.14 97.16,103.64 J69.2
  Top 0.559: J62.2 61.09,104.64 v61.21,104.52 | J69.2 v91.96,103.64 v91.95,103.63 91.95,91.19 89.78,89.02 D25.A
  Bottom 0.178: JP9.2 v97.66,104.14 97.66,105.92 95.99,107.59 95.99,110.21 J63.2
  Bottom 0.559: v61.21,104.52 61.85,105.16 90.42,105.16 v91.95,103.63
3.3V5  (via drill 0.3)
  Top 0.178: v143.89,104.14 143.39,103.64 J84.2
  Top 0.559: J77.2 107.32,104.64 v107.44,104.52 | J84.2 v138.18,103.64 v138.18,103.63 138.18,91.19 136.01,89.02 D30.A
  Bottom 0.178: JP11.2 v143.89,104.14 143.89,105.92 142.22,107.59 142.22,110.21 J78.2
  Bottom 0.559: v107.44,104.52 108.08,105.16 136.65,105.16 v138.18,103.63
!RESET!  (via drill 0.3)
  Top 0.178: S1.3 47.5,29.21 | 47.5,29.21 S1.4 | U4.67 22.47,29.2 v22.48,29.21 | 47.5,29.21 v46.86,29.21
  Bottom 0.178: v22.48,29.21 43.69,29.21 | 43.69,29.21 v46.86,29.21 | J13.1 43.69,29.21
!RESET!1  (via drill 0.3)
  Top 0.178: S2.3 93.73,29.21 | 93.73,29.21 S2.4 | U5.67 68.7,29.2 v68.71,29.21 | 93.73,29.21 v93.09,29.21
  Bottom 0.178: v68.71,29.21 89.92,29.21 | 89.92,29.21 v93.09,29.21 | J22.1 89.92,29.21
!RESET!2  (via drill 0.3)
  Top 0.178: S3.3 139.95,29.21 | 139.95,29.21 S3.4 | U8.67 114.92,29.2 v114.94,29.21 | 139.95,29.21 v139.32,29.21
  Bottom 0.178: v114.94,29.21 136.14,29.21 | 136.14,29.21 v139.32,29.21 | J37.1 136.14,29.21
!RESET!3  (via drill 0.3)
  Top 0.178: S4.3 47.5,96.52 | 47.5,96.52 S4.4 | U11.67 v22.47,96.51 v22.48,96.52 | 47.5,96.52 v46.86,96.52
  Bottom 0.178: v22.48,96.52 43.69,96.52 | 43.69,96.52 v46.86,96.52 | J52.1 43.69,96.52
!RESET!4  (via drill 0.3)
  Top 0.178: S5.3 93.73,96.52 | 93.73,96.52 S5.4 | U14.67 68.7,96.51 v68.71,96.52 | 93.73,96.52 v93.09,96.52
  Bottom 0.178: v68.71,96.52 89.92,96.52 | 89.92,96.52 v93.09,96.52 | J67.1 89.92,96.52
!RESET!5  (via drill 0.3)
  Top 0.178: S6.3 139.95,96.52 | 139.95,96.52 S6.4 | U17.67 114.92,96.51 v114.94,96.52 | 139.95,96.52 v139.32,96.52